# Altium PCB FMCOMMS3.PcbDoc (part 1 of 3)
Units mil, origin at the board's own origin, x right, y up, seen from the top; angles counter-clockwise.
Board outline 3368 x 2770 mil, 4 copper layers (Top Layer, Layer 1, Layer 2, Bottom Layer), stack 23.756 mil thick; 160 components, 137 nets, 746 pads, 735 vias.
Unrouted connection lines stored in the file: 16.
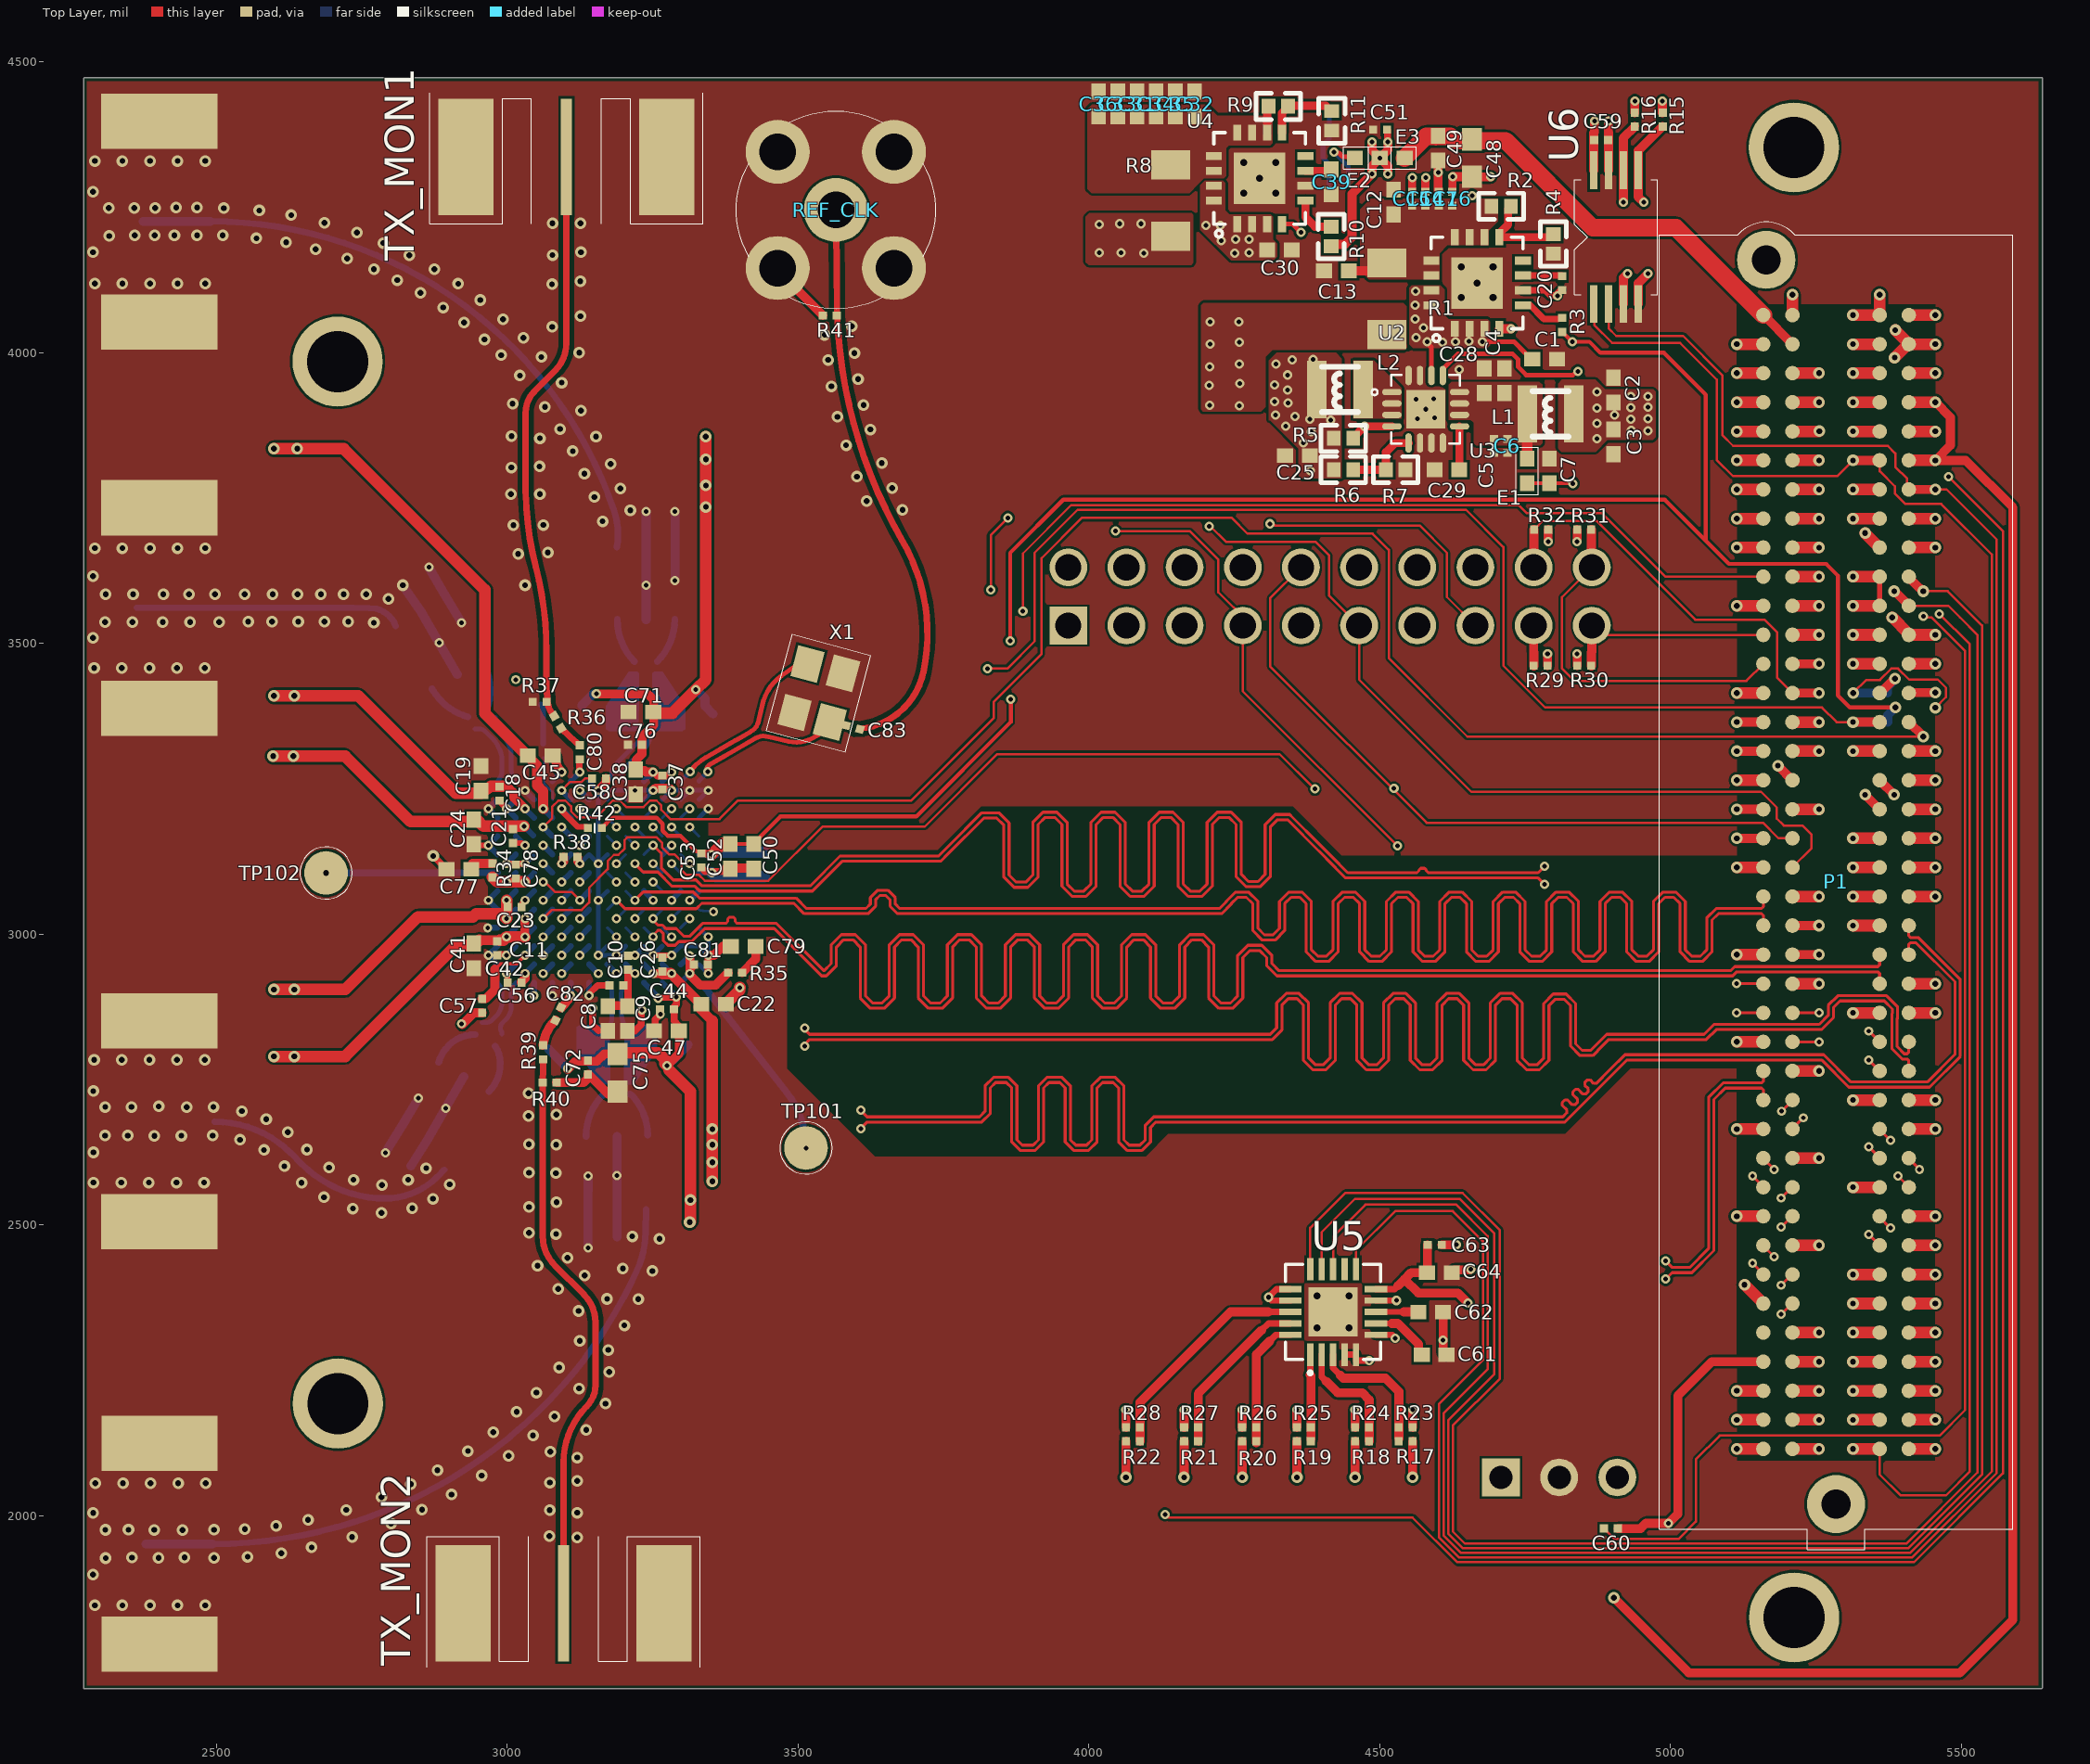
[diagram p0: Top Layer view]
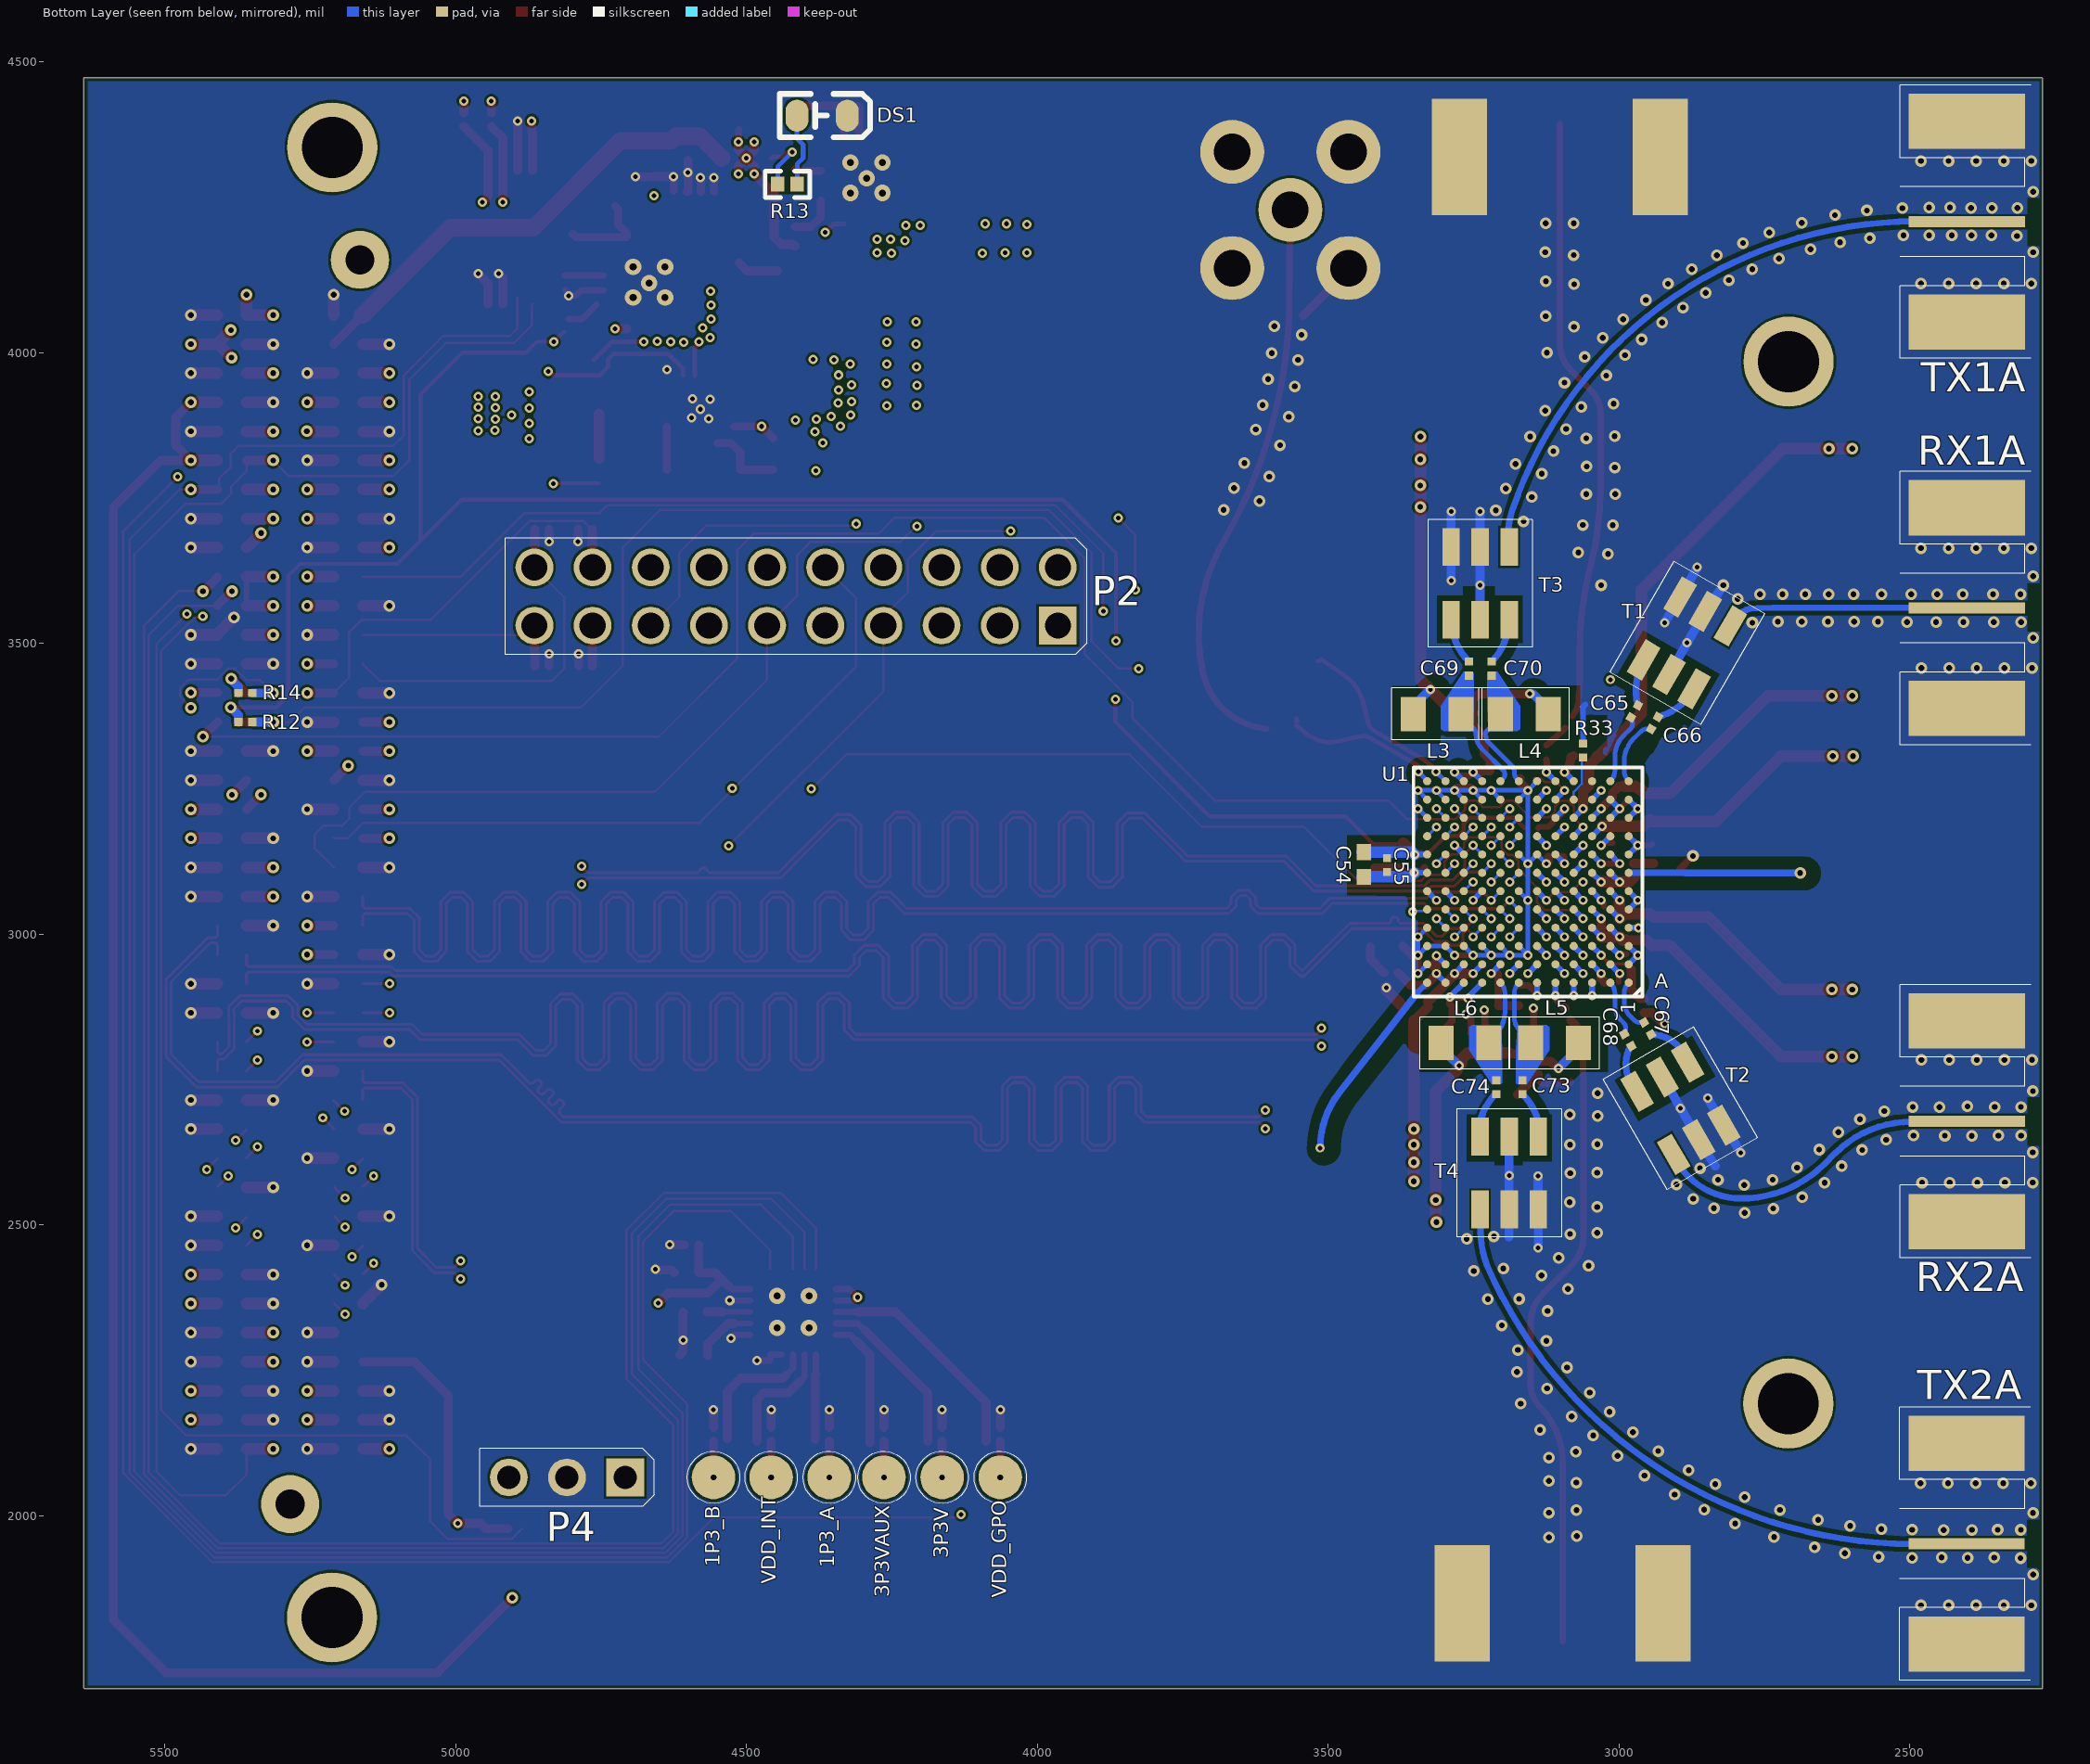
[diagram p1: Bottom Layer view, seen from below]
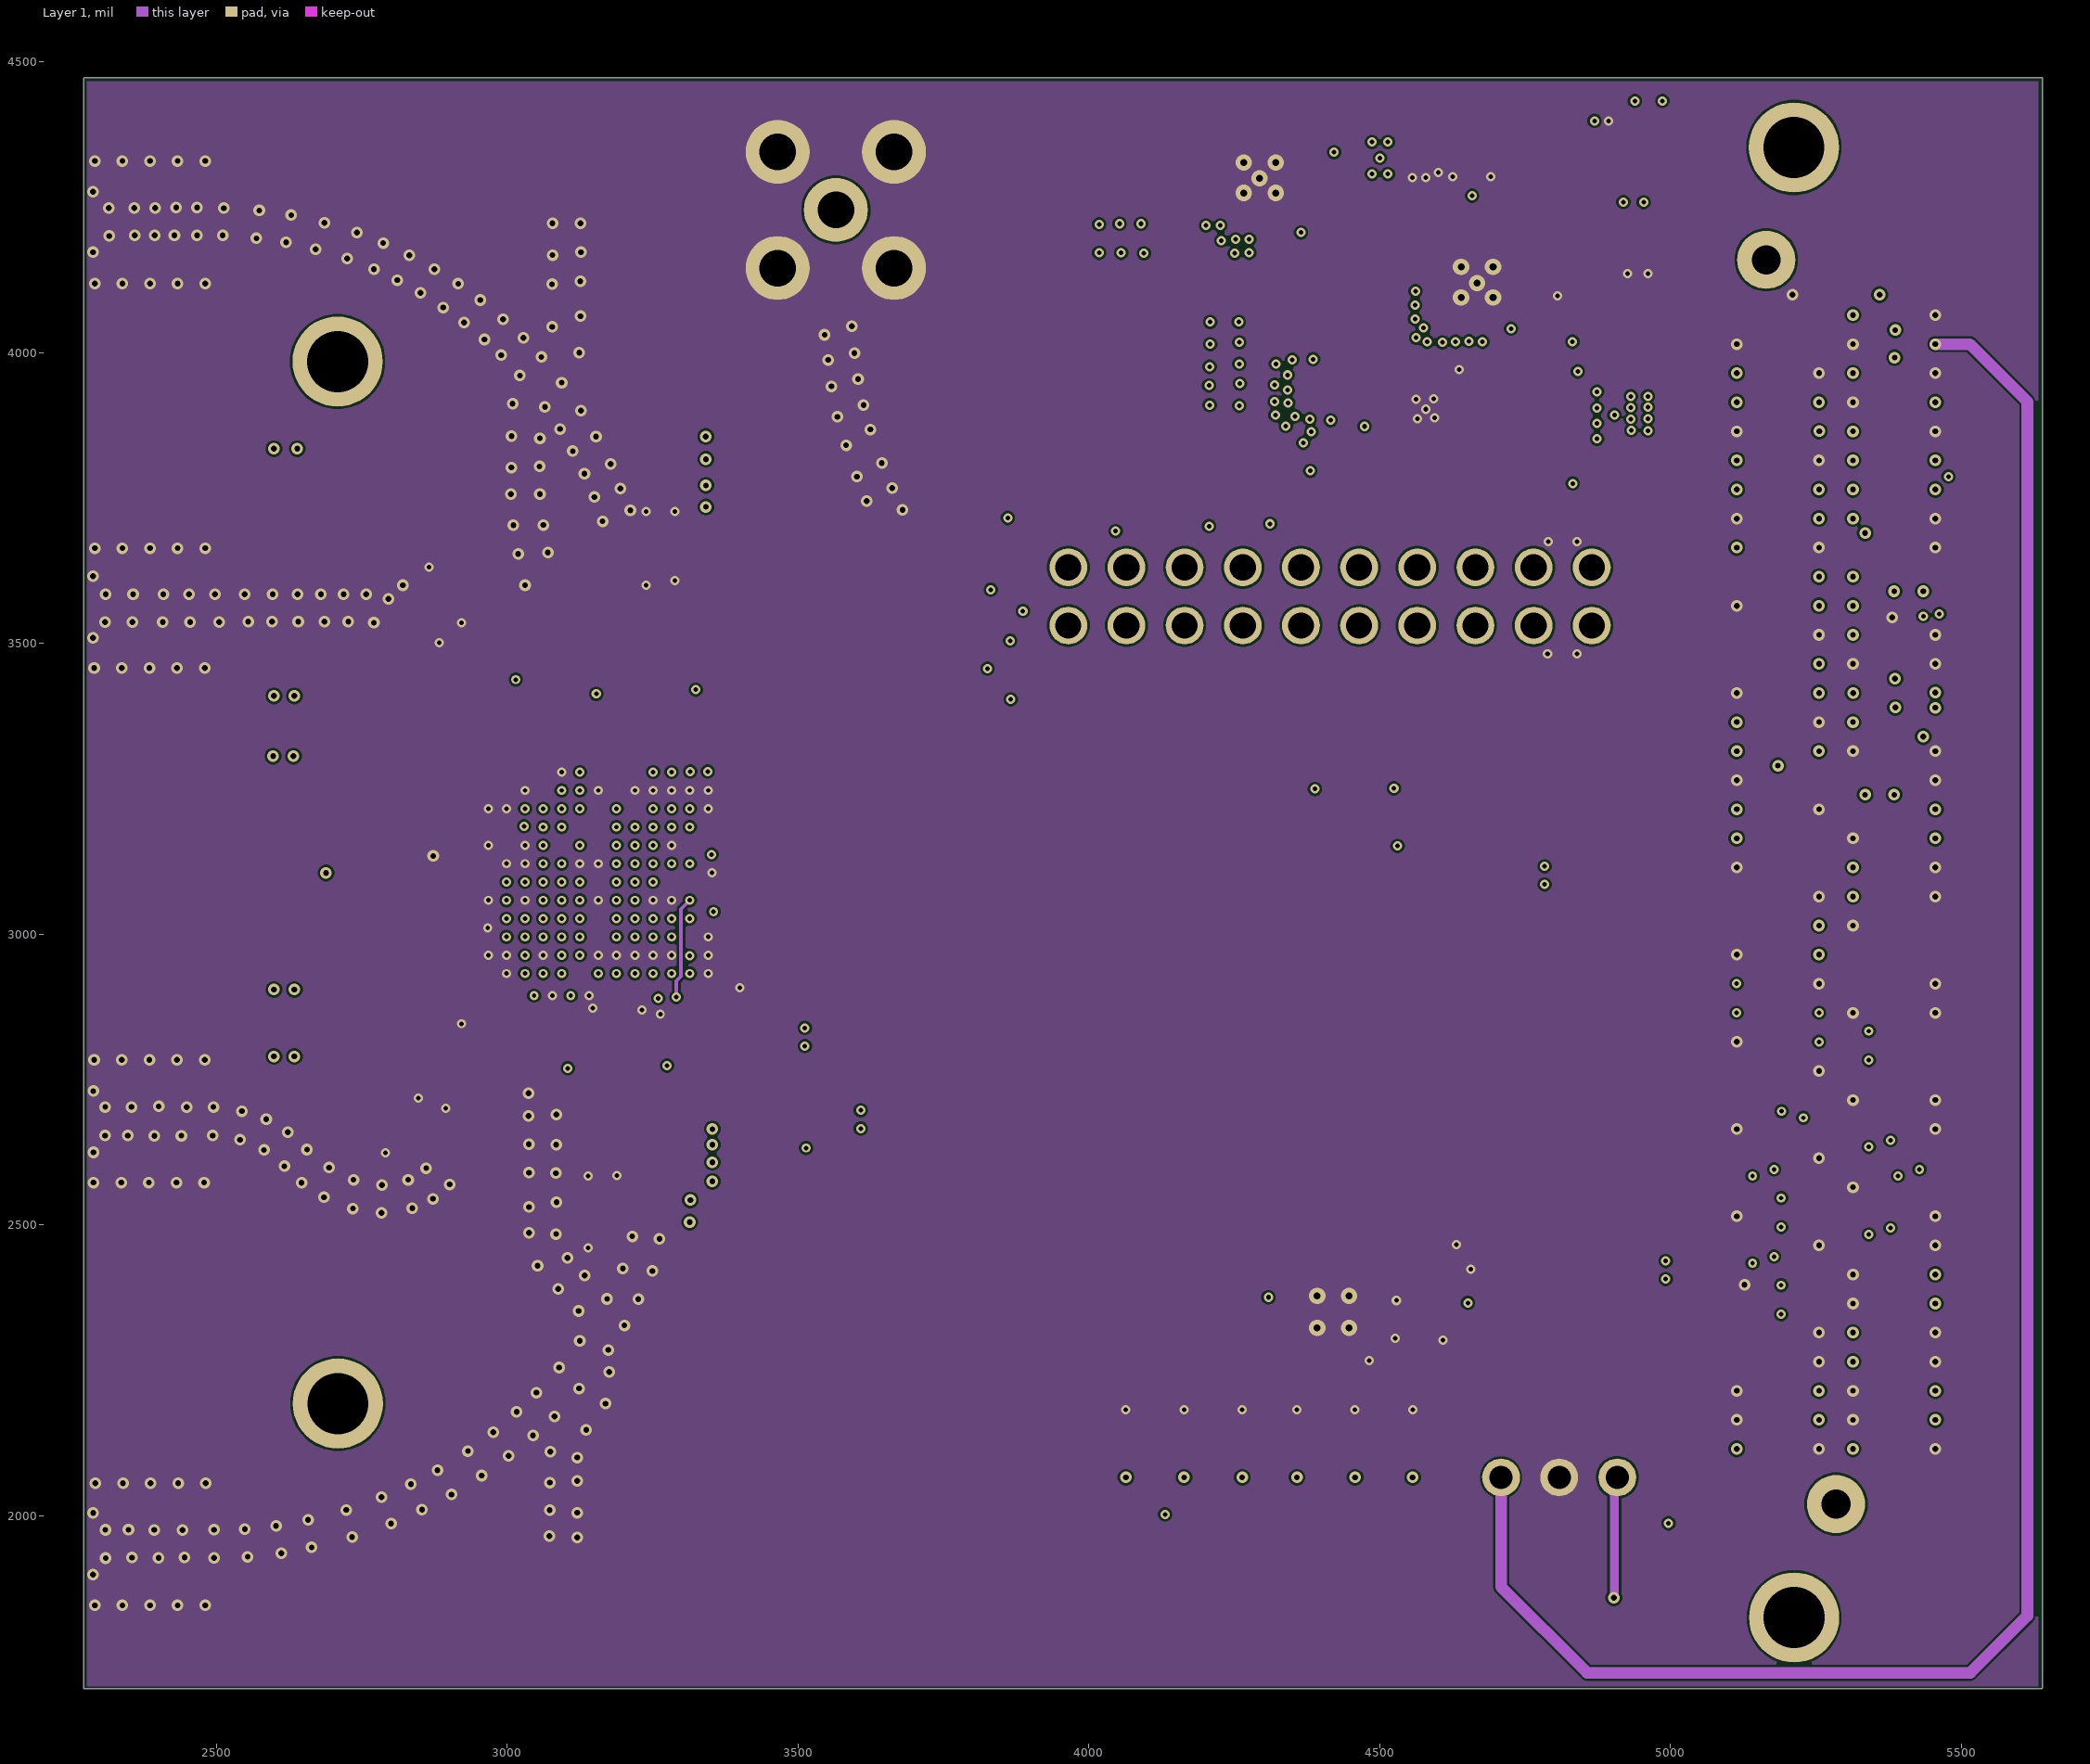
[diagram p2: Layer 1]
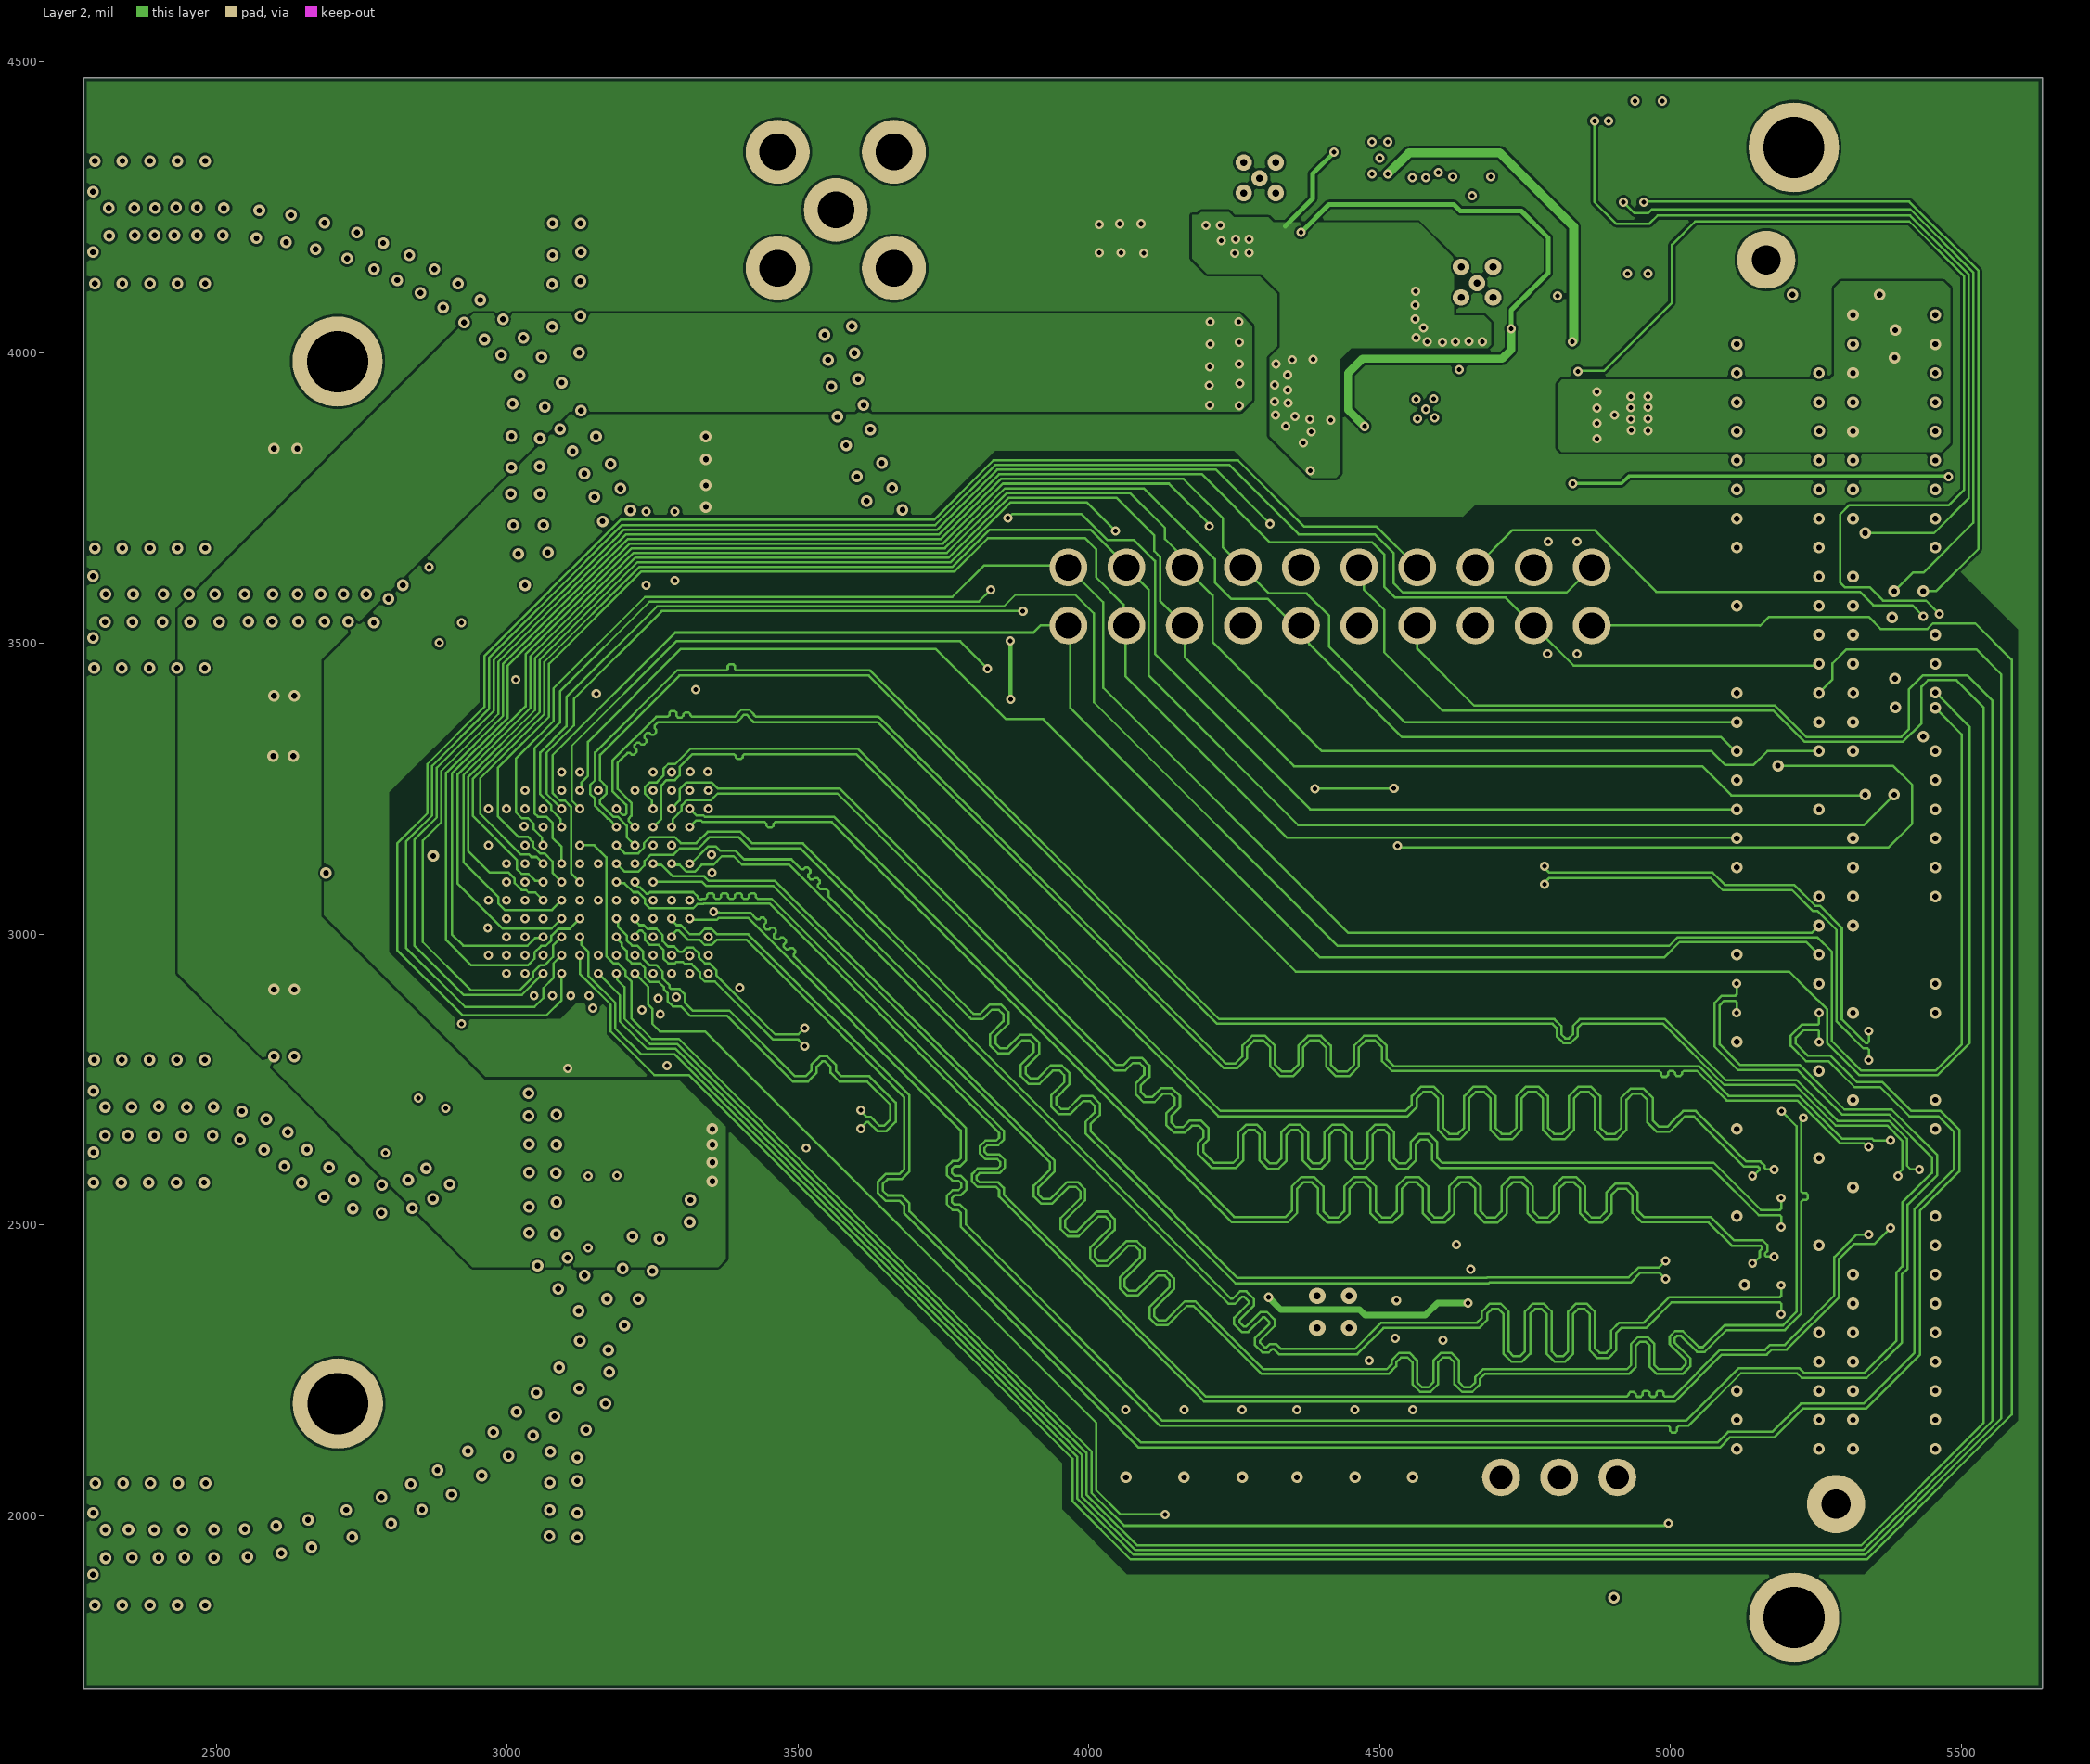
[diagram p3: Layer 2]

## Layer stack, top to bottom
Top Solder: solder mask 0.4, Solder Resist, Dk 3.5
Top Layer: signal copper 1.4
Dielectric 2: prepreg 2.8, PP-006, Dk 4.1
Layer 1: signal copper 1.378
Dielectric 1: dielectric 12.6, FR-4, Dk 4.8
Layer 2: signal copper 1.378
Dielectric 3: prepreg 2.8, PP-006, Dk 4.1
Bottom Layer: signal copper 1.4
Bottom Solder: solder mask 0.4, Solder Resist, Dk 3.5

## Board outline
2272,1703 5639,1703 5640,1704 5640,4473 2273,4473 2272,4472

## Design rules (kind name [scope] priority, off if disabled: settings)
Clearance [All] p1: gap=4 ignorepadtopadclearanceinfootprint=FALSE
ComponentClearance [All] p1: gap=1 collisioncheckmode=3 verticalgap=100000 showdistances=TRUE
DiffPairsRouting 差分对TXD [InDifferentialPairClass('TXD')] p1: maxlimit=10 minlimit=4 mostfreqgap=5 toplayer_prefgap=4 toplayer_minwidth=4 toplayer_maxwidth=15 toplayer_prefwidth=4.96 midlayer1_minwidth=4 midlayer1_maxwidth=15 midlayer1_prefwidth=4.02 midlayer2_minwidth=4 midlayer2_maxwidth=15 midlayer2_prefwidth=4.02 bottomlayer_prefgap=4 bottomlayer_minwidth=4 bottomlayer_maxwidth=15 bottomlayer_prefwidth=4.96 maxuncoupledlength=500
DiffPairsRouting 差分对RXD [InDifferentialPairClass('RXD')] p2: maxlimit=10 minlimit=4 mostfreqgap=5 toplayer_prefgap=4 toplayer_minwidth=4 toplayer_maxwidth=15 toplayer_prefwidth=4.96 midlayer1_minwidth=4 midlayer1_maxwidth=15 midlayer1_prefwidth=4.02 midlayer2_minwidth=4 midlayer2_maxwidth=15 midlayer2_prefwidth=4.02 bottomlayer_prefgap=4 bottomlayer_minwidth=4 bottomlayer_maxwidth=15 bottomlayer_prefwidth=4.96 maxuncoupledlength=500
HoleToHoleClearance [All] p1: gap=4 allowstackedmicrovias=TRUE
Length SPI [InNetClass('SPI')] p1: maxlimit=20 minlimit=0
Length C_OUT [InNetClass('C_OUT')] p2: maxlimit=20 minlimit=0
Length C_IN [InNetClass('C_IN')] p3: maxlimit=20 minlimit=0
MatchedLengths TX_DATA [InDifferentialPairClass('TXD')] p1: tolerance=1000 checknetsindiffpair=FALSE checkdiffpairvsdiffpair=TRUE checkxsignals=TRUE checkothers=TRUE
MatchedLengths RX_DATA [InDifferentialPairClass('RXD')] p2: tolerance=1000 checknetsindiffpair=FALSE checkdiffpairvsdiffpair=TRUE checkxsignals=TRUE checkothers=TRUE
MinimumSolderMaskSliver [All] p1: minsoldermaskwidth=4
PlaneConnect [All] p1: planeconnectstyle=Direct reliefexpansion=20 reliefentries=4 reliefconductorwidth=10 reliefairgap=10
PolygonConnect [All] p1: connectstyle=Direct reliefconductorwidth=10 reliefentries=4 polygonreliefangle="90 Angle" airgapwidth=10
RoutingVias [All] p1: holewidth=7.87 width=15.75 viastyle="Through Hole" minholewidth=7.87 minwidth=15.75 maxholewidth=28 maxwidth=50
SilkToSilkClearance [All] p1: silktosilkclearance=4
SilkToSolderMaskClearance [IsPad] p1: minsilkscreentomaskgap=4 clearancetoexposedcopper=TRUE
SolderMaskExpansion [All] p1: expansion=4 istentingtop=FALSE
Width [All] p1: maxlimit=50 minlimit=4 preferedwidth=4
23 further rules are at their usual default settings.

## Classes and differential pairs
net class TX: FB_CLK_N FB_CLK_P TX_D0_N TX_D0_P TX_D1_N TX_D1_P TX_D2_N TX_D2_P TX_D3_N TX_D3_P TX_D4_N TX_D4_P TX_D5_N TX_D5_P TX_FRAME_N TX_FRAME_P
net class RX: DATA_CLK_N DATA_CLK_P RX_D0_N RX_D0_P RX_D1_N RX_D1_P RX_D2_N RX_D2_P RX_D3_N RX_D3_P RX_D4_N RX_D4_P RX_D5_N RX_D5_P RX_FRAME_N RX_FRAME_P
differential pair class TXD: FB_CLK TX_D0 TX_D1 TX_D2 TX_D3 TX_D4 TX_D5 TX_FRAME
differential pair class RXD: DATA_CLK RX_D0 RX_D1 RX_D2 RX_D3 RX_D4 RX_D5 RX_FRAME
net class SPI: SPI_CLK SPI_DI SPI_DO SPI_ENB
net class C_OUT: CTRL_OUT0 CTRL_OUT1 CTRL_OUT2 CTRL_OUT3 CTRL_OUT4 CTRL_OUT5 CTRL_OUT6 CTRL_OUT7
net class C_IN: CTRL_IN0 CTRL_IN1 CTRL_IN2 CTRL_IN3
component class "03 AD9361_Digital": C65 C66 C67 C68 C69 C70 C71 C72 C73 C74 C75 C76 C77 C78 C79 C80 C81 C82 C83 L3 L4 L5 L6 R33 R34 R35 R36 R37 R38 R39 R40 R41 R42 REF_CLK RX1A RX2A T1 T2 T3 TP101 TP102 TX1A TX2A TX_MON1 TX_MON2 U1 X1
component class "02 LP_FMC": 1P3_A 1P3_B 3P3V 3P3VAUX C56 C57 C58 C59 C60 C61 C62 C63 C64 DS1 P1 P2 R12 R13 R14 R15 R16 R17 R18 R19 R20 R21 R22 R23 R24 R25 R26 R27 R28 R29 R30 R31 R32 U5 U6 VDD_GPO VDD_INT
component class "01 POWER": 3 C1 C2 C3 C4 C5 C6 C7 C8 C10 C11 C12 C13 C14 C15 C16 C17 C18 C19 C20 C21 C22 C23 C24 C25 C26 C28 C29 C30 C31 C32 C33 C34 C35 C36 C37 C38 C39 C41 C42 C44 C45 C47 C48 C49 C50 C51 C52 C53 C54 C55 E1 E2 E3 L1 L2 P4 R1 R2 R3 R4 R5 R6 R7 R8 R9 R10 R11 U2 U3 U4
differential pair TX_FRAME: +TX_FRAME_P -TX_FRAME_N
differential pair TX_D5: +TX_D5_P -TX_D5_N
differential pair TX_D4: +TX_D4_P -TX_D4_N
differential pair TX_D3: +TX_D3_P -TX_D3_N
differential pair TX_D2: +TX_D2_P -TX_D2_N
differential pair TX_D1: +TX_D1_P -TX_D1_N
differential pair TX_D0: +TX_D0_P -TX_D0_N
differential pair TX2A: +TX2A_P -TX2A_N
differential pair TX1A: +TX1A_P -TX1A_N
differential pair RX_FRAME: +RX_FRAME_P -RX_FRAME_N
differential pair RX_D5: +RX_D5_P -RX_D5_N
differential pair RX_D4: +RX_D4_P -RX_D4_N
differential pair RX_D3: +RX_D3_P -RX_D3_N
differential pair RX_D2: +RX_D2_P -RX_D2_N
differential pair RX_D1: +RX_D1_P -RX_D1_N
differential pair RX_D0: +RX_D0_P -RX_D0_N
differential pair RX2A: +RX2A_P -RX2A_N
differential pair RX1A: +RX1A_P -RX1A_N
differential pair FB_CLK: +FB_CLK_P -FB_CLK_N
differential pair DATA_CLK: +DATA_CLK_P -DATA_CLK_N

## Components (designator, comment, footprint, x,y, rotation, side; value= is the part's Value field where it differs from the comment)
1P3_A "TEST POINT SURFACE" TPC75D45 4358,2066 r90 bottom (schematic designator TP241)
1P3_B "TEST POINT SURFACE" TPC75D45 4557,2066 r90 bottom (schematic designator TP244)
3P3V "TEST POINT SURFACE" TPC75D45 4164,2066 r90 bottom (schematic designator TP239)
3P3VAUX "TEST POINT SURFACE" TPC75D45 4264,2066 r90 bottom (schematic designator TP238)
C1 "0.1UF" C0402 4784,3989 r180 top
C2 "10UF" C0402 4902,3936 r90 top
C3 "0.1UF" C0402 4902,3847 r270 top
C4 "10UF" C0402 4715,3952 r90 top
C5 "0.1UF" C0201 4697,3840 r270 top
C6 "0.1UF" C0201 4720,3840 r270 top
C7 "0.1UF" C0402 4792,3797 r90 top
C8 "1UF" C0402 3173,2855 r270 top
C9 "1UF" C0402 3207,2855 r270 top
C10 "0.01UF" C0201 3208,2951 r90 top
C11 "0.01UF" C0201 3188,2912 r180 top
C12 "10UF" C0402 4524,4259.25 r90 top
C13 "10UF" C0402 4426,4141 r180 top
C14 "0.1UF" C0201 4579,4265 r90 top
C15 "0.1UF" C0201 4556,4265 r90 top
C16 "0.1UF" C0201 4625,4265 r90 top
C17 "0.1UF" C0201 4602,4265 r90 top
C18 "0.01UF" C0201 2987,3242 r270 top
C19 "1UF" C0402 2955,3268 r90 top
C20 "0.01UF" C0201 4814,4120 r270 top
C21 "0.01UF" C0201 3010,3169 r270 top
C22 "1UF" C0402 3355,2880 r0 top
C23 "0.01UF" C0201 3013,3047 r0 top
C24 "1UF" C0402 2943,3176 r270 top
C25 "10UF" C0402 4359,3823 r0 top
C26 "0.01UF" C0201 3267,2948 r90 top
C28 "10UF" C0402 4680,3952 r270 top
C29 "0.1μF" C0402 4616,3799 r0 top
C30 "0.1UF" C0402 4328,4177 r180 top
C31 "10UF" C0402 4083,4428 r90 top
C32 "10UF" C0402 4182,4428 r90 top
C33 "0.1UF" C0402 4050,4428 r90 top
C34 "0.1UF" C0402 4116,4428 r90 top
C35 "0.1UF" C0402 4149,4428 r90 top
C36 "0.1UF" C0402 4017,4428 r90 top
C37 "0.01UF" C0201 3267,3261 r270 top
C38 "1UF" C0402 3221,3262 r270 top
C39 "0.01UF" C0402 4417,4294 r270 top
C41 "1UF" C0402 2943,2963 r270 top
C42 "0.01UF" C0201 2983,2976 r270 top
C44 "0.01UF" C0201 3275,2871 r180 top
C45 "1UF" C0402 3057,3307 r0 top
C47 "1UF" C0402 3274,2834 r180 top
C48 "10UF" C0603 4659,4335 r270 top
C49 "0.1UF" C0402 4601,4352 r270 top
C50 "10UF" C0402 3424,3134 r270 top
C51 "0.1UF" C0201 4501,4384 r180 top
C52 "1UF" C0402 3384,3134 r270 top
C53 "0.01UF" C0201 3334,3127 r270 top
C54 "1UF" C0402 3439,3120 r270 bottom
C55 "0.01UF" C0201 3399,3119 r270 bottom
C56 "0.1UF" C0201 3013,2917 r180 top
C57 "0.1UF" C0201 2957,2877 r270 top
C58 "0.1UF" C0201 3158,3268 r0 top
C59 "0.1UF" C0201 4881,4366 r180 top
C60 "0.1UF" C0201 4898,1978 r0 top
C61 "10UF" C0402 4594,2277 r180 top
C62 "1UF" C0402 4588,2350 r0 top
C63 "0.1UF" C0201 4595,2466 r0 top
C64 "10UF" C0402 4603,2418 r0 top
C65 "18PF" C0201 2973.64,3383.39 r120 bottom
C66 "18PF" C0201 2939,3363.39 r120 bottom
C67 "18PF" C0201 2951,2838 r240 bottom
C68 "18PF" C0201 2985,2818 r240 bottom
C69 "18PF" C0201 3258,3457 r90 bottom
C70 "18PF" C0201 3219,3457 r90 bottom
C71 "10UF" C0402 3230,3382 r0 top
C72 "1000PF" C0201 3139,2771 r90 top
C73 "18PF" C0201 3166,2737 r270 bottom
C74 "18PF" C0201 3211,2737 r270 bottom
C75 "10UF" C0603 3190,2762 r90 top
C76 "1000PF" C0201 3220,3326 r0 top
C77 "1UF" C0402 2917,3112 r0 top
C78 "1000PF" C0201 3015,3108 r90 top
C79 "1UF" C0402 3406,2979 r0 top
C80 "1000PF" C0201 3125,3313 r270 top
C81 "1000PF" C0201 3333,2948 r0 top
C82 "1000PF" C0201 3088,2863 r65 top
C83 "0.1UF" C0201 3595,3356 r345 top
DS1 "16-213SURC/S530-A3/TR8" LED0805-RD 4370.31,4408 r0 bottom
E1 "750OHM" L0402 4754,3797 r90 top
E2 "750OHM" L0402 4479,4335 r180 top
E3 "750OHM" L0402 4522,4335 r0 top
L1 "0.47UH" L1008 4794.08,3895 r180 top
L2 "2.2UH" L1008 4432,3937 r180 top
L3 "330NH" L0805-F 3313,3379 r0 bottom
L4 "330NH" L0805-F 3163,3379 r180 bottom
L5 "330NH" L0805-F 3111.19,2813 r180 bottom locked
L6 "330NH" L0805-F 3265,2813 r0 bottom locked
P1 "ASP-134604-01" CNSAMTECASP-134604-01 5285,3083.5 r90 top locked
P2 "Header 10X2" CNBERGF2X10H335LD32 4415,3581 r0 bottom locked
P4 "Header 3" CNBERG1X3H205LD36 4809,2066 r0 bottom
R1 "0" R1206 4513,4093 r270 top
R2 "16K" LC-0402_R 4709.27,4252 r180 top
R3 "10K" C0201 4814,4048 r90 top
R4 "10K" LC-0402_R 4799,4187.27 r90 top
R5 "10K" LC-0402_R 4438,3853 r0 top
R6 "18.7K" LC-0402_R 4438,3799 r0 top
R7 "15K" LC-0402_R 4528,3799 r0 top
R8 "0" R1206 4141,4262 r270 top
R9 "16K" LC-0402_R 4326,4424 r180 top
R10 "10K" LC-0402_R 4417,4200 r90 top
R11 "10K" LC-0402_R 4418,4399 r90 top
R12 "10K" C0201 5362,3365 r0 bottom
R13 "237" LC-0402_R 4430,4290 r0 bottom
R14 "49.9" C0201 5362,3415 r180 bottom
R15 "2K" C0201 4987,4401 r90 top
R16 "2K" C0201 4939,4401 r90 top
R17 "10K" C0201 4545,2128 r180 top
R18 "10K" C0201 4470,2128 r0 top
R19 "10K" C0201 4370,2128 r0 top
R20 "10K" C0201 4276,2128 r0 top
R21 "10K" C0201 4176,2128 r0 top
R22 "10K" C0201 4076,2128 r0 top
R23 "16K" C0201 4545,2152 r0 top
R24 "16K" C0201 4470,2152 r180 top
R25 "16K" C0201 4370,2152 r180 top
R26 "16K" C0201 4276,2152 r180 top
R27 "16K" C0201 4176,2152 r180 top
R28 "16K" C0201 4076,2152 r180 top
R29 "10K" C0201 4777,3462 r180 top
R30 "10K" C0201 4852,3462 r0 top
R31 "10K" C0201 4852,3696 r0 top
R32 "10K" C0201 4778,3696 r180 top
R33 "14.3K" C0201 3062,3316 r270 bottom
R34 "1" C0201 2975,3110 r90 top
R35 "1" C0201 3392,2934 r0 top
R36 "10" C0201 3087,3365 r300 top
R37 "49.9" C0201 3056.13,3399.74 r0 top
R38 "10K" C0201 3109,3133 r180 top
R39 "10" C0201 3062,2797 r90 top
R40 "49.9" C0201 3073,2745 r180 top
R41 "49.9" C0201 3555,4064 r0 top
R42 "10K" R0201 3151,3183 r180 top
REF_CLK "DOSIN-806-0010" CNJOHNSON142-0701-201 3565.25,4245.75 r90 top
RX1A "DOSIN-806-0010" CNSMARAL687W375H171 2404.5,3561 r180 bottom locked
RX2A "DOSIN-806-0010" CNSMARAL687W375H171 2404.5,2678.5 r180 bottom locked
T1 "TCM1-63AX+" TSML150W160H160 2883.07,3501.08 r210 bottom
T2 "TCM1-63AX+" TSML150W160H160 2894.36,2700.71 r330 bottom
T3 "TCM1-63AX+" TSML150W160H160 3239,3603.5 r180 bottom
T4 "TCM1-63AX+" TSML150W160H160 3189,2589.5 r0 bottom
TP101 "TEST POINT SURFACE" TPC75D45 3513.97,2632.5 r90 top
TP102 "TEST POINT SURFACE" TPC75D45 2688.72,3105.51 r90 top
TX1A "DOSIN-806-0010" CNSMARAL687W375H171 2404.5,4225.5 r180 bottom locked
TX2A "DOSIN-806-0010" CNSMARAL687W375H171 2405,1952 r180 bottom locked
TX_MON1 "DOSIN-806-0010" CNSMARAL687W375H171 3102,4334.5 r90 top locked (schematic designator RF1)
TX_MON2 "DOSIN-806-0010" CNSMARAL687W375H171 3097,1852 r270 top locked (schematic designator RF2)
U1 "AD9363" AD936X 3120.51,3081.28 r0 bottom locked
U2 "ADP1755ACPZ-R7" LFCSP-WQ-16_L4.0-W4.0-P0.65-EP2.3-BL-EP 4667.79,4120.26 r0 top
U3 "TLV62130" TLV62130RGT 4580,3903 r270 top
U4 "ADP1755ACPZ-R7" LFCSP-WQ-16_L4.0-W4.0-P0.65-EP2.3-BL-EP 4294,4300 r0 top
U5 "AD7291BCPZ-RL7" LFCSP-20_L4.0-W4.0-P0.50-TL-EP2.7 4420.31,2350.52 r90 top locked
U6 "M24C02-WDW6TP" TSSOP8 4906.61,4198.96 r0 top
VDD_GPO "TEST POINT SURFACE" TPC75D45 4064,2066 r90 bottom (schematic designator TP240)
VDD_INT "TEST POINT SURFACE" TPC75D45 4458,2066 r90 bottom (schematic designator TP243)
X1 "40MHz" XTALNX3225 3535.78,3415 r75 top

## Footprints (in the part's own frame and the unit in brackets; to place one, negate y for a bottom-side part, rotate by r counter-clockwise, add the part's x,y. Pads: shape width x height; smd on the part's side, far side on the other; paste and mask are expansions set on the pad)
AD936X [mil]
  round 14 smd: A1(-137.01,164.51) A2(-105.51,164.51) A3(-74.02,164.51) A4(-42.52,164.51) A5(-11.02,164.51) A6(20.47,164.51) A7(51.97,164.51) A8(83.46,164.51) A9(114.96,164.51) A10(146.46,164.51) A11(177.95,164.51) A12(209.45,164.51) B1(-137.01,133.01) B2(-105.51,133.01) B3(-74.02,133.01) B4(-42.52,133.01) B5(-11.02,133.01) B6(20.47,133.01) B7(51.97,133.01) B8(83.46,133.01) B9(114.96,133.01) B10(146.46,133.01) B11(177.95,133.01) B12(209.45,133.01) C1(-137.01,101.52) C2(-105.51,101.52) C3(-74.02,101.52) C4(-42.52,101.52) C5(-11.02,101.52) C6(20.47,101.52) C7(51.97,101.52) C8(83.46,101.52) C9(114.96,101.52) C10(146.46,101.52) C11(177.95,101.52) C12(209.45,101.52) D1(-137.01,70.02) D2(-105.51,70.02) D3(-74.02,70.02) D4(-42.52,70.02) D5(-11.02,70.02) D6(20.47,70.02) D7(51.97,70.02) D8(83.46,70.02) D9(114.96,70.02) D10(146.46,70.02) D11(177.95,70.02) D12(209.45,70.02) E1(-137.01,38.52) E2(-105.51,38.52) E3(-74.02,38.52) E4(-42.52,38.52) E5(-11.02,38.52) E6(20.47,38.52) E7(51.97,38.52) E8(83.46,38.52) E9(114.96,38.52) E10(146.46,38.52) E11(177.95,38.52) E12(209.45,38.52) F1(-137.01,7.03) F2(-105.51,7.03) F3(-74.02,7.03) F4(-42.52,7.03) F5(-11.02,7.03) F6(20.47,7.03) F7(51.97,7.03) F8(83.46,7.03) F9(114.96,7.03) F10(146.46,7.03) F11(177.95,7.03) F12(209.45,7.03) G1(-137.01,-24.47) G2(-105.51,-24.47) G3(-74.02,-24.47) G4(-42.52,-24.47) G5(-11.02,-24.47) G6(20.47,-24.47) G7(51.97,-24.47) G8(83.46,-24.47) G9(114.96,-24.47) G10(146.46,-24.47) G11(177.95,-24.47) G12(209.45,-24.47) H1(-137.01,-55.96) H2(-105.51,-55.96) H3(-74.02,-55.96) H4(-42.52,-55.96) H5(-11.02,-55.96) H6(20.47,-55.96) H7(51.97,-55.96) H8(83.46,-55.96) H9(114.96,-55.96) H10(146.46,-55.96) H11(177.95,-55.96) H12(209.45,-55.96) J1(-137.01,-87.46) J2(-105.51,-87.46) J3(-74.02,-87.46) J4(-42.52,-87.46) J5(-11.02,-87.46) J6(20.47,-87.46) J7(51.97,-87.46) J8(83.46,-87.46) J9(114.96,-87.46) J10(146.46,-87.46) J11(177.95,-87.46) J12(209.45,-87.46) K1(-137.01,-118.96) K2(-105.51,-118.96) K3(-74.02,-118.96) K4(-42.52,-118.96) K5(-11.02,-118.96) K6(20.47,-118.96) K7(51.97,-118.96) K8(83.46,-118.96) K9(114.96,-118.96) K10(146.46,-118.96) K11(177.95,-118.96) K12(209.45,-118.96) L1(-137.01,-150.45) L2(-105.51,-150.45) L3(-74.02,-150.45) L4(-42.52,-150.45) L5(-11.02,-150.45) L6(20.47,-150.45) L7(51.97,-150.45) L8(83.46,-150.45) L9(114.96,-150.45) L10(146.46,-150.45) L11(177.95,-150.45) L12(209.45,-150.45) M1(-137.01,-181.95) M2(-105.51,-181.95) M3(-74.02,-181.95) M4(-42.52,-181.95) M5(-11.02,-181.95) M6(20.47,-181.95) M7(51.97,-181.95) M8(83.46,-181.95) M9(114.96,-181.95) M10(146.46,-181.95) M11(177.95,-181.95) M12(209.45,-181.95)
  silkscreen extent -161,-206 233,188
C0201 [mil] "C0201"
  rect 14x14 smd: 1(-12,0) 2(12,0)
C0402 [mil] "C0402"
  rect 27.5x25 smd: 1(-21.25,0) 2(21.25,0)
C0603 [mil] "C0603"
  rect 38.5x35 smd: 1(-32.25,0) 2(32.25,0)
CNBERG1X3H205LD36 [mil] "CNBERG1X3H205LD36"
  rect 65x65 / inner round 65 / far side rect 65x65 hole 40: 1(-100,0)
  round 65 hole 40: 2(0,0) 3(100,0)
  silkscreen extent -150,-50 150,50
CNBERGF2X10H335LD32 [mil] "CNBERGF2X10H335LD32"
  rect 65x65 / inner round 65 / far side rect 65x65 hole 45: 1(-450,50)
  round 65 hole 45: 2(-450,-50) 3(-350,50) 4(-350,-50) 5(-250,50) 6(-250,-50) 7(-150,50) 8(-150,-50) 9(-50,50) 10(-50,-50) 11(50,50) 12(50,-50) 13(150,50) 14(150,-50) 15(250,50) 16(250,-50) 17(350,50) 18(350,-50) 19(450,50) 20(450,-50)
  silkscreen extent -500,-100 500,100
CNJOHNSON142-0701-201 [mil] "CNJOHNSON142-0701-201"
  round 110 hole 63: 1(100,100) 2(100,-100) 3(-100,-100) 4(-100,100) 5(0,0)
  silkscreen extent -169,-172 169,172
CNSAMTECASP-134604-01 [mil] "CNSAMTECASP-134604-01"
  round 25 smd: C1(-968.5,-125) C2(-918.5,-125) C3(-868.5,-125) C4(-818.5,-125) C5(-768.5,-125) C6(-718.5,-125) C7(-668.5,-125) C8(-618.5,-125) C9(-568.5,-125) C10(-518.5,-125) C11(-468.5,-125) C12(-418.5,-125) C13(-368.5,-125) C14(-318.5,-125) C15(-268.5,-125) C16(-218.5,-125) C17(-168.5,-125) C18(-118.5,-125) C19(-68.5,-125) C20(-18.5,-125) C21(31.5,-125) C22(81.5,-125) C23(131.5,-125) C24(181.5,-125) C25(231.5,-125) C26(281.5,-125) C27(331.5,-125) C28(381.5,-125) C29(431.5,-125) C30(481.5,-125) C31(531.5,-125) C32(581.5,-125) C33(631.5,-125) C34(681.5,-125) C35(731.5,-125) C36(781.5,-125) C37(831.5,-125) C38(881.5,-125) C39(931.5,-125) C40(981.5,-125) D1(-968.5,-75) D2(-918.5,-75) D3(-868.5,-75) D4(-818.5,-75) D5(-768.5,-75) D6(-718.5,-75) D7(-668.5,-75) D8(-618.5,-75) D9(-568.5,-75) D10(-518.5,-75) D11(-468.5,-75) D12(-418.5,-75) D13(-368.5,-75) D14(-318.5,-75) D15(-268.5,-75) D16(-218.5,-75) D17(-168.5,-75) D18(-118.5,-75) D19(-68.5,-75) D20(-18.5,-75) D21(31.5,-75) D22(81.5,-75) D23(131.5,-75) D24(181.5,-75) D25(231.5,-75) D26(281.5,-75) D27(331.5,-75) D28(381.5,-75) D29(431.5,-75) D30(481.5,-75) D31(531.5,-75) D32(581.5,-75) D33(631.5,-75) D34(681.5,-75) D35(731.5,-75) D36(781.5,-75) D37(831.5,-75) D38(881.5,-75) D39(931.5,-75) D40(981.5,-75) G1(-968.5,75) G2(-918.5,75) G3(-868.5,75) G4(-818.5,75) G5(-768.5,75) G6(-718.5,75) G7(-668.5,75) G8(-618.5,75) G9(-568.5,75) G10(-518.5,75) G11(-468.5,75) G12(-418.5,75) G13(-368.5,75) G14(-318.5,75) G15(-268.5,75) G16(-218.5,75) G17(-168.5,75) G18(-118.5,75) G19(-68.5,75) G20(-18.5,75) G21(31.5,75) G22(81.5,75) G23(131.5,75) G24(181.5,75) G25(231.5,75) G26(281.5,75) G27(331.5,75) G28(381.5,75) G29(431.5,75) G30(481.5,75) G31(531.5,75) G32(581.5,75) G33(631.5,75) G34(681.5,75) G35(731.5,75) G36(781.5,75) G37(831.5,75) G38(881.5,75) G39(931.5,75) G40(981.5,75) H1(-968.5,125) H2(-918.5,125) H3(-868.5,125) H4(-818.5,125) H5(-768.5,125) H6(-718.5,125) H7(-668.5,125) H8(-618.5,125) H9(-568.5,125) H10(-518.5,125) H11(-468.5,125) H12(-418.5,125) H13(-368.5,125) H14(-318.5,125) H15(-268.5,125) H16(-218.5,125) H17(-168.5,125) H18(-118.5,125) H19(-68.5,125) H20(-18.5,125) H21(31.5,125) H22(81.5,125) H23(131.5,125) H24(181.5,125) H25(231.5,125) H26(281.5,125) H27(331.5,125) H28(381.5,125) H29(431.5,125) H30(481.5,125) H31(531.5,125) H32(581.5,125) H33(631.5,125) H34(681.5,125) H35(731.5,125) H36(781.5,125) H37(831.5,125) H38(881.5,125) H39(931.5,125) H40(981.5,125)
  round 100 hole 50 unplated: ""(-1063.5,0) ""(1076.5,120)
  silkscreen extent -1142,-304 1141,304
CNSMARAL687W375H171 [mil]
  rect 200x95 smd far side: 1(2.5,-172.5) 3(2.5,172.5)
  rect 200x95 smd: 2(2.5,172.5) 4(2.5,-172.5)
  rect 200x19 smd: 5(2.5,0)
  silkscreen extent -113,-235 113,235
L0402 [mil] "L0402"
  rect 27.5x25 smd: 1(-21.25,0) 2(21.25,0)
  silkscreen extent -41,-19 41,19
L0805-F [mil] "L0805-F"
  rect 43x59 smd: 1(41.19,0) 2(-41.19,0)
  silkscreen extent -78,-44 78,44
L1008 [mil]
  rect 33.5x98.4 smd: 1(-39.92,0) 2(40.08,0)
  silkscreen extent -31,-39 31,39
LC-0402_R [mm]
  rect 0.6x0.65 smd mask+0.051: 1(-0.425,0) 2(0.425,0)
  silkscreen extent -0.97,-0.58 0.97,0.58, body extent -0.57,-0.27 0.58,0.28, height 0.41
LED0805-RD [mm]
  oval 1x1.4 smd: 1(-1.1,0) 2(1.1,0)
  silkscreen extent -2.1,-0.95 1.85,0.95
LFCSP-20_L4.0-W4.0-P0.50-TL-EP2.7 [mm]
  rect 0.985x0.28 smd: 1(-1.868,1) 2(-1.868,0.5) 3(-1.868,0) 4(-1.868,-0.5) 5(-1.868,-1) 11(1.868,-1) 12(1.868,-0.5) 13(1.868,0) 14(1.868,0.5) 15(1.868,1)
  rect 0.28x0.985 smd: 6(-1,-1.868) 7(-0.5,-1.868) 8(0,-1.868) 9(0.5,-1.868) 10(1,-1.868) 16(1,1.868) 17(0.5,1.868) 18(0,1.868) 19(-0.5,1.868) 20(-1,1.868)
  rect 2.15x2.15 smd: 21(0,0)
  silkscreen extent -2.73,-2.08 2.08,2.08
LFCSP-WQ-16_L4.0-W4.0-P0.65-EP2.3-BL-EP [mm]
  rect 0.35x0.7 smd: 1(-0.975,-2) 2(-0.325,-2) 3(0.325,-2) 4(0.975,-2) 9(0.975,2) 10(0.325,2) 11(-0.325,2) 12(-0.975,2)
  rect 0.7x0.35 smd: 5(2,-0.975) 6(2,-0.325) 7(2,0.325) 8(2,0.975) 13(-2,0.975) 14(-2,0.325) 15(-2,-0.325) 16(-2,-0.975)
  rect 2.25x2.25 smd: 17(0,0)
  silkscreen extent -2,-2.56 2,2
R0201 [mil] "R0201"
  rect 14x14 smd: 1(-12,0) 2(12,0)
  silkscreen extent -1,-8 1,8
R1206 [mil] "R1206"
  rect 50x67 smd: 1(-61.5,0) 2(61.5,0)
  silkscreen extent -7,-38 7,38
TLV62130RGT [mil]
  oval 11x33.5 smd: 1(-29.5,-58.6) 2(-9.8,-58.6) 3(9.8,-58.6) 4(29.5,-58.6) 9(29.5,57.6) 10(9.8,57.6) 11(-9.8,57.6) 12(-29.5,57.6)
  oval 33.5x11 smd: 5(58.1,-30) 6(58.1,-10.3) 7(58.1,9.3) 8(58.1,29) 13(-58.1,29) 14(-58.1,9.3) 15(-58.1,-10.3) 16(-58.1,-30)
  rect 66.9x66.9 smd: 20(0,-0.5)
  silkscreen extent -59,-93 59,59
TPC75D45 [mil] "TPC75D45"
  round 75 smd: 1(0,0)
  silkscreen extent -45,-45 45,45
TSML150W160H160 [mil] "TSML150W160H160"
  rect 30x65.01 smd: 1(-50,62.5) 2(0,62.5) 3(50,62.5) 4(50,-62.5) 5(0,-62.5) 6(-50,-62.5)
  silkscreen extent -90,-110 90,110
TSSOP8 [mil] "TSSOP8"
  rect 13x65 smd: 1(-38.39,-114.96) 2(-12.8,-114.96) 3(12.8,-114.96) 4(38.39,-114.96) 5(38.39,114.96) 6(12.8,114.96) 7(-12.8,114.96) 8(-38.39,114.96)
  silkscreen extent -71,-99 71,99
XTALNX3225 [mil] "XTALNX3225"
  rect 55.01x47 smd: 1(-43.32,-31.51) 2(43.3,-31.51) 3(43.3,31.5) 4(-43.32,31.5)
  silkscreen extent -86,-70 86,70

## Part data
1P3_A 1P3_B 3P3V 3P3VAUX TP101 TP102 VDD_GPO VDD_INT: library part "TEST POINT SURFACE_1"
C1 C2 C3 C4 C5 C6 C7 C12 C13 C14 C15 C16 C17 C20 C30 C31 C32 C33 C34 C35 C36 C39 C48 C49 C50 C51 C56 C57 C58 C59 C60 C61 C63 C64 C65 C66 C67 C68 C69 C70 C71 C73 C74 C75 C83: BOM_Manufacturer=WTC, BOM_Manufacturer Part=0402B104K160, BOM_Supplier=LCSC, BOM_Supplier Part=C83056, nameAlias=Capacitance, spicePre=C, spiceSymbolName=0402B104K160
C8 C9 C10 C11 C18 C19 C21 C22 C23 C24 C26 C37 C38 C41 C42 C44 C45 C47 C52 C53 C54 C55: library part 10UF, BOM_Manufacturer=WTC, BOM_Manufacturer Part=0402B104K160, BOM_Supplier=LCSC, BOM_Supplier Part=C83056, nameAlias=Capacitance, spicePre=C, spiceSymbolName=0402B104K160
C25 C28 C29: library part CAP_3, "Capacitor"
C62 C77 C79: library part 0.1UF, BOM_Manufacturer=WTC, BOM_Manufacturer Part=0402B104K160, BOM_Supplier=LCSC, BOM_Supplier Part=C83056, nameAlias=Capacitance, spicePre=C, spiceSymbolName=0402B104K160
C72 C76 C80 C82: library part 18PF, BOM_Manufacturer=WTC, BOM_Manufacturer Part=0402B104K160, BOM_Supplier=LCSC, BOM_Supplier Part=C83056, nameAlias=Capacitance, spicePre=C, spiceSymbolName=0402B104K160
C78 C81: library part 100PF, BOM_Manufacturer=WTC, BOM_Manufacturer Part=0402B104K160, BOM_Supplier=LCSC, BOM_Supplier Part=C83056, nameAlias=Capacitance, spicePre=C, spiceSymbolName=0402B104K160
DS1: BOM_Manufacturer="Everlight Elec", BOM_Manufacturer Part=16-213SURC/S530-A3/TR8, BOM_Supplier=LCSC, BOM_Supplier Part=C605452, Contributor=LCSC, spicePre=L, spiceSymbolName=16-213SURC/S530-A3/TR8
E1 E2 E3: library part 100OHM, BOM_Manufacturer=Murata, BOM_Manufacturer Part=BLM21PG221SN1x, BOM_Supplier=LCSC, Contributor=prophetC, spicePre=L, spiceSymbolName="220ohm at 100MHz"
L1 L2: library part INDUCTANCE_1, "Inductance"
L3 L4 L5 L6: BOM_JLCPCB SMD=Yes, BOM_Manufacturer=Sunlord, BOM_Manufacturer Part=GZ1608D121TF, BOM_Supplier=LCSC, BOM_Supplier Part=C12391, nameAlias=Value, SMT Type=Extend, spicePre=L, spiceSymbolName=GZ1608D121TF-C12391
P2: "Header, 10-Pin, Dual row", LatestRevisionDate=17-Jul-2002, LatestRevisionNote="Re-released for DXP Platform.", Publisher="Altium Limited"
P4: "Header, 3-Pin", LatestRevisionDate=17-Jul-2002, LatestRevisionNote="Re-released for DXP Platform.", Publisher="Altium Limited"
R1 R8 R36 R37 R39 R40 R41: library part 1, BOM_Manufacturer=YAGEO, BOM_Manufacturer Part=RC0402FR-0780R6L, BOM_Supplier=LCSC, BOM_Supplier Part=C185392, Contributor=LCSC, nameAlias="Resistance (Ohms)", spicePre=R, spiceSymbolName=RC0402FR-0780R6L
R2 R9 R23 R24 R25 R26 R27 R28 R33: library part 10K, BOM_Manufacturer=YAGEO, BOM_Manufacturer Part=RC0402FR-0780R6L, BOM_Supplier=LCSC, BOM_Supplier Part=C185392, Contributor=LCSC, nameAlias="Resistance (Ohms)", spicePre=R, spiceSymbolName=RC0402FR-0780R6L
R3 R4 R10 R11 R12 R17 R18 R19 R20 R21 R22 R29 R30 R31 R32 R34 R35 R38 R42: BOM_Manufacturer=YAGEO, BOM_Manufacturer Part=RC0402FR-0780R6L, BOM_Supplier=LCSC, BOM_Supplier Part=C185392, Contributor=LCSC, nameAlias="Resistance (Ohms)", spicePre=R, spiceSymbolName=RC0402FR-0780R6L
R5 R6 R7: library part RES, "Resistor"
R13: library part 10R, BOM_Manufacturer=YAGEO, BOM_Manufacturer Part=RC0402FR-0780R6L, BOM_Supplier=LCSC, BOM_Supplier Part=C185392, Contributor=LCSC, nameAlias="Resistance (Ohms)", spicePre=R, spiceSymbolName=RC0402FR-0780R6L
R14: library part 39, BOM_Manufacturer=YAGEO, BOM_Manufacturer Part=RC0402FR-0780R6L, BOM_Supplier=LCSC, BOM_Supplier Part=C185392, Contributor=LCSC, nameAlias="Resistance (Ohms)", spicePre=R, spiceSymbolName=RC0402FR-0780R6L
R15 R16: library part 1K, BOM_Manufacturer=YAGEO, BOM_Manufacturer Part=RC0402FR-0780R6L, BOM_Supplier=LCSC, BOM_Supplier Part=C185392, Contributor=LCSC, nameAlias="Resistance (Ohms)", spicePre=R, spiceSymbolName=RC0402FR-0780R6L
REF_CLK RX1A RX2A TX1A TX2A TX_MON1 TX_MON2: BOM_Manufacturer=dosinconn, BOM_Manufacturer Part=DOSIN-806-0010, BOM_Supplier=LCSC, BOM_Supplier Part=C521221, Contributor=LCSC, spicePre=R, spiceSymbolName=DOSIN-806-0010
U2 U4 U5: BOM_Manufacturer="Analog Devices", BOM_Paste Type=expand, BOM_Supplier=LCSC, Contributor=LCSC, spicePre=U
  U2 U4: BOM_Manufacturer Part=ADP1755ACPZ-R7, BOM_Supplier Part=C403695, spiceSymbolName=ADP1755ACPZ-R7
  U5: BOM_Manufacturer Part=AD7291BCPZ-RL7, BOM_Supplier Part=C207434, spiceSymbolName=AD7291BCPZ-RL7
U6: BOM_Manufacturer=STMicroelectronics, BOM_Manufacturer Part=M24C02-WDW6TP, BOM_Paste Type=expand, BOM_Supplier=LCSC, BOM_Supplier Part=C283436, Contributor=LCSC, spicePre=U, spiceSymbolName=M24C02-WDW6TP
X1: library part 30MHz, BOM_Manufacturer=NDK, BOM_Manufacturer Part=NX3225SA-30M, BOM_Supplier=LCSC, BOM_Supplier Part=C139739, Contributor=LCSC, nameAlias=Frequency, spicePre=X, spiceSymbolName=NX3225SA-30M
T1 T2 T3 T4: Contributor=GaAs, spicePre=T, spiceSymbolName=TCM1-63AX+
U1: Contributor=fumanduo, spicePre=U, spiceSymbolName=AD9363_PLUTO

## Free pads (board coordinates)
  round 155 hole 105: ""(2708.5,3985) ""(2709,2193) ""(5212.61,4353.29) ""(5213,1825)

## Via types
v1: diameter 20, hole 10, Top Layer to Bottom Layer, tented both sides, 410 vias
v2: diameter 15.75, hole 7.87, Top Layer to Bottom Layer, tented both sides, 157 vias
v3: diameter 16, hole 8, Top Layer to Bottom Layer, tented both sides, 154 vias
v4: diameter 28, hole 12, Top Layer to Bottom Layer, 14 vias

## Nets (pads, with @x,y where several pads share a name; then routed paths per layer and width w, separated by ;. In a path a pad name is that pad's centre, name@x,y a point inside that pad or via, vN(x,y) a via of type N, cw(c..) or ccw(c..) an arc to the next point about the centre after c; other vN are vias at no path point)
1P3_SUPPLY_A: 1P3_A.1 C18.1 C19.1 C21.1 C22.1 C23.1 C24.1 C26.1 R1.2 R19.1 U1.B9 U1.B10 U1.E2 U1.F2 U1.J3 U1.K3 | length 2115.2
  Top Layer w10: v2(2999.25,3027.01) v2@2999.25,3027.69 ; C23.1@2999.25,3042.43 ccw(c2996.43,3047.5) C23.1@3002.23,3047.5 ; C21.1@3009.64,3185.75 cw(c3007.17,3180.76) C21.1@3012.74,3180.76
  Top Layer w15.5: 2946.73,3033.75 2946.73,3035.25 ; C18.1@2991.73,3254.5 2999.73,3254.5 3003.98,3250.25 3011.48,3242.79 3011.48,3235.25 v2(3030.75,3215.98) ; v2(3251.22,2932.52) C26.1@3267.71,2932.52 ; v1(4358,2066) R19.1@4358,2128
  Top Layer w17: v2@3280.66,2932.52 C22.1@3328.96,2884.22 ; C22.1@3328.96,2875.01 3352.71,2851.26
  Top Layer w20: v1(2597.74,3306.26) v1(2632.74,3306.26) 2721.49,3306.26 2833.99,3193.76 2943.99,3193.76 2947.74,3197.51 2959.5,3185.75 3009.64,3185.75 v2(3029.26,3185.75) ; v1(2599.23,2905) v1(2634.23,2905) 2721.73,2905 2846.73,3030 2941.48,3030 2946.73,3035.25 2991.01,3035.25 2998.57,3027.69 2999.25,3027.69 2999.25,3035.25 2999.25,3042.43 2999.25,3047.5 v2(2999.25,3058.5) ; v1(2599.23,3410) v1(2634.23,3410) 2744.23,3410 2911.73,3242.5 2955.48,3242.5 2959.23,3246.25 2972.48,3254.5 C18.1@2991.73,3254.5 ; C26.1@3267.71,2932.52 v2@3280.66,2932.52 ; 3352.71,2851.26 3352.71,2665.29 v1(3353,2665) ; v1(3353,2575) v1(3353,2608) v1(3353,2638) v1@3353,2664.71
  Bottom Layer w10: v2(2999.25,3027.01) U1.E2@3015,3042.76 ; v2(2999.25,3058.5) U1.F2@3015,3074.25 ; v2(3029.26,3185.75) U1.J3@3045,3170 ; v2(3030.75,3215.98) U1.K3@3046.49,3200.24 ; U1.B9@3235.47,2948.27 v2(3251.22,2932.52) ; U1.B10@3266.97,2948.27 v2(3282.72,2932.52)
  other v3: 4259,3909 4208,3910 4207,3944 4260,3947 4208,3976 4259,3981 4209,4015 4259,4018 4209,4053 4258,4053
1P3_SUPPLY_B: 1P3_B.1 C37.1 C38.1 C41.1 C42.1 C44.1 C45.1 C47.1 C71.2 C72.2 C75.2 C76.2 L3.1 L4.1 L5.1 L6.1 R8.2 R17.1 U1.A9 U1.A10 U1.D2 U1.D3 U1.E3 U1.F12 U1.K4 U1.M9 U1.M10 | length 3560.2
  Top Layer w10: v2(3260,2890) 3261,2891 3290,2891 v2(3291,2892)
  Top Layer w12: v2(3251.22,3278.98) 3258.2,3272 3275.74,3272 v2(3282.72,3278.98) ; C44.1@3287.01,2868.48 3287.01,2850.98 3296.26,2841.73 C47.1@3296.26,2834 ; C44.1@3287.01,2875.98 3291,2879.97 v2(3291,2892)
  Top Layer w15: v2(3030.75,2995.51) v2(3030.75,3027.01)
  Top Layer w15.5: v3@3104.15,2767.85 3118.05,2781.75 3154.75,2781.75 3167.25,2794.25 C75.2@3190,2794.25 ; v3(3153.32,3413.5) 3241.23,3413.5 3252.23,3402.5 3252.23,3380.26 3252.23,3360 3231.98,3339.75 3231.98,3310 3221.73,3299.75 3221.73,3281.25 3236.73,3281.25 ; 3239,3278.98 v2(3251.22,3278.98) ; v3@3278.41,2777.5 3296.26,2795.35 C47.1@3296.26,2834 ; v1(4557,2066) R17.1@4557,2128
  Top Layer w17: C41.1@2952.23,2989.75 C42.1@2987.48,2989.75
  Top Layer w18: C45.1@3035.48,3306.25 3037.75,3306.25 3040.5,3303.5 3040.5,3301.23 3051.5,3290.23 3051.5,3256.25 3062,3245.75 3062,3216.22 v2(3062.24,3215.98)
  Top Layer w20: v1(2599.23,2790) v1(2634.23,2790) 2721.73,2790 2912.98,2981.25 2941.73,2981.25 2942.73,2980.25 C41.1@2952.23,2989.75 ; v1(2599.23,3835) v1(2639.23,3835) 2719.23,3835 2961.73,3592.5 2961.73,3380 C45.1@3035.48,3306.25 ; C42.1@2987.48,2989.75 2993.49,2989.75 v2(2999.25,2995.52) v2(3030.75,2995.51) ; C75.2@3190.01,2796.25 3259.66,2796.25 3271.38,2784.53 3271.38,2777.83 v3(3275.06,2774.15) ; C71.2@3252.23,3380.26 3283.98,3380.26 v3(3324.52,3420.8) 3341.73,3438.01 3341.73,3598 v1(3341.73,3856) ; 3278.41,2766.6 3315.01,2730 v1(3315,2543) 3315,2506 v1(3314,2505)
  Layer 1 w6: v2(3291,2892) 3291,2919.76 3299,2927.76 3299,3043.29 v2(3314.22,3058.51)
  Bottom Layer w10: v2(3030.75,2995.51) U1.D3@3046.49,3011.26 ; v2(3030.75,3027.01) U1.E3@3046.49,3042.76 ; v2(3062.24,3215.98) U1.K4@3077.99,3200.24 ; U1.A9@3235.47,2916.77 v2@3259.5,2892.74 ; U1.M9@3235.47,3263.23 v2(3251.22,3278.98) ; U1.A10@3266.97,2916.77 3291,2892.74 v2(3291,2892) ; U1.M10@3266.97,3263.23 v2(3282.72,3278.98) ; v2(3314.22,3058.51) U1.F12@3329.96,3074.25 ; v2(2999.25,2995.52) U1.D2@3015,3011.26 v2(2999.25,2995.52)
  Bottom Layer w15.5: L5.1@3071,2803 v3(3104.39,2769.61) ; L4.1@3129,3393 3129,3394.19 3148.21,3413.4 3153.22,3413.4 v3(3153.32,3413.5) ; v3(3275.06,2774.15) 3292.16,2791.25 3292.44,2791.25 3311.38,2810.19 L6.1@3311.38,2810.51 ; v3(3324.52,3420.8) 3324.62,3420.7 3325.3,3420.7 3340.44,3405.56 3340.44,3392.75 L3.1@3354.19,3379
  other v1: 3341.87,3734.97 3341.87,3771.97 3341.87,3816.97
  other v3: 4095,4171 4018,4172 4056,4172 4018,4221 4053,4222 4090,4222
1P8V: C1.2 C25.2 C30.2 E2.2 L2.2 R5.1 R6.1 R13.2 U2.1 U2.2 U2.3 U2.15 U2.16 U3.14 U4.1 U4.2 U4.3 U4.15 U4.16 | length 426.1
  Top Layer w8: v3(4422,4345) 4423.53,4343.47 4430.4,4343.47 4436.69,4337.19 4455.56,4337.19 E2.2@4457.75,4335 ; v3(4582,4019) 4582,4016.84 4589.3,4009.54 U3.14@4589.3,3961.1 ; v3(4677,4019) 4731.53,4019 4741.69,4008.85 ; 4741.69,4008.81 4761.5,3989 C1.2@4762.75,3989
  Layer 2 w8: 4338,4218 4385,4265 4385,4308 v3(4422,4345)
  Bottom Layer w8: v3(4422,4345) 4446.73,4320.27 R13.2@4446.73,4290
  other v3: 4381,3797 4369,3845 4383,3864 4339,3874 4416,3884 4380,3886 4355,3891 4321,3893 4343,3914 4320,3916 4342,3936 4320,3945 4342,3962 4322,3981 4350,3988 4386,3989 4608,4018 4631,4019 4654,4020 4563,4026 4576,4043 4561,4058 4561,4082 4562,4106 4251,4171 4276,4172 4228,4193 4253,4195 4276,4195 4202,4219 4226,4219
3.3VAUX: 3P3VAUX.1 C59.2 C63.1 C64.1 P1.D32 R15.2 R16.2 R20.1 U5.10 U5.16 U5.17 U6.8 | length 2369.6
  Top Layer w11: v3(4309.04,2375.77) 4323.15,2389.88 U5.16@4346.79,2389.89 ; v3@4314.1,2370.21 U5.17@4346.79,2370.21 ; U5.10@4493.84,2389.89 4526.21,2389.89 4531.84,2395.52
  Top Layer w15.5: v1(4264,2066) R20.1@4264,2128 ; 4531.84,2395.52 4543.09,2406.77 ; C64.1@4582.09,2418.02 4554.34,2418.02 4543.09,2406.77 ; C64.1@4582.34,2418.27 C63.1@4582.34,2466 ; v3(4652,2366) 4635,2383 4566.86,2383 4543.09,2406.77 ; U6.8@4868.22,4313.92 4868.22,4377.85 ; 4869.61,4378.96 v3(4869.61,4398.96) ; R16.2@4939,4413 v3(4939,4433) ; R15.2@4986.5,4413 v3(4986.5,4433)
  Top Layer w20: v1(5335,3690) P1.D32@5360,3665
  Layer 2 w4: v3(4869.61,4398.96) 4869.61,4259.39 4906.81,4222.19 4964.19,4222.19 4978,4236 5412.31,4236 5513,4135.31 5513,3749.55 5453.45,3690 v1(5335,3690)
  Layer 2 w11: v3(4309.04,2375.77) 4330.31,2354.5 4465.5,2354.5 4475,2345 4579,2345 4600,2366 v3(4652,2366)
3P3V: 3P3V.1 C2.1 C3.1 L1.1 P1.C39 P1.D36 P1.D38 P1.D40 P4.1 R21.1 | length 3828
  Top Layer w15.5: v1(4164,2066) R21.1@4164,2128
  Top Layer w20: v1(5314.18,3865) P1.D36@5360,3865 ; v1(5314.18,3965) P1.D38@5360,3965 ; v1(5314.18,4065) P1.D40@5360,4065 v1(5360,4100) ; v1(5385.85,3991.78) P1.C39@5409.07,4015 ; v1(5386.78,4039.15) P1.C39@5410,4015.93 ; P1.C39@5410,4015 v1(5455.82,4015)
  Layer 1 w20: P4.1@4709,2066 4709,1878 4857,1730 5516,1730 5614,1828 5614,3916 5515,4015 v1(5455.82,4015)
  other v3: 4874,3852 4961.32,3866.28 4933,3867 4874,3879 4932,3886 4961.32,3886.28 4904,3893 4874,3905 4932,3906 4961.32,3906.28 4932.32,3925.28 4961.32,3925.28 4874,3933
12V: P1.C35 P1.C37 P4.3 | length 3279.4
  Top Layer w15.5: v1(4903,1859) 5032,1730 5498,1730 5589,1821 5589,3734 5508,3815 v1(5455.82,3815) 5481.73,3840.91 5481.73,3889.09 v1(5455.82,3915)
  Top Layer w20: P1.C35@5410,3815 v1(5455.82,3815) ; P1.C37@5410,3915 v1(5455.82,3915)
  Layer 1 w15.5: v1(4903,1859) 4903.86,1859.86 4903.86,2060.86 P4.3@4909,2066
AUXADC: C58.1 U1.L5 | length 85.9
  Top Layer w4: v2(3093.75,3247.48) 3108.27,3262 3127.89,3262 3133.89,3268 C58.1@3146,3268
  Layer 2 w4: v2(3093.75,3247.48) v2@3095.75,3245.48
  Bottom Layer w10: v2(3093.75,3247.48) U1.L5@3109.49,3231.73
AUXDAC1: C56.1 U1.B3 | length 39.6
  Top Layer w15.5: C56.1@3024.48,2917.76 3030.74,2924.02 v2(3030.74,2932.53)
  Bottom Layer w10: v2(3030.74,2932.53) U1.B3@3046.49,2948.27
AUXDAC2: C57.1 U1.C3 | length 146.9
  Top Layer w6: 2979.74,2940.52 2988.24,2949.02 3015.74,2949.02 v2(3030.74,2964.02)
  Top Layer w15.5: C57.1@2956.72,2889.5 2963.72,2889.5 2979.22,2905 2979.22,2940
  Bottom Layer w10: v2(3030.74,2964.02) U1.C3@3046.49,2979.76
CLK_OUT: C60.2 P1.H4 U1.J6 | length 3051.8
  Top Layer w15.5: C60.2@4910,1978 4948.93,1978 4957.93,1987 v3(4997,1987) 5013,2003 5013,2206.27 5071.73,2265 P1.H4@5160,2265
  Layer 2 w4: v2(3125.23,3153) 3150,3153 3170.61,3132.39 3170.61,2962.01 3182.48,2950.14 3190.23,2950.14 3203.82,2936.55 3203.82,2928.8 3213.66,2918.96 3213.66,2855.34 3249,2820 3295.54,2820 4005,2110.54 4005,2039 4061,1983 4989.75,1983 4993.75,1987 v3(4997,1987)
  Bottom Layer w10: v2(3125.23,3153) U1.J6@3140.98,3168.74
CTRL_IN0: P1.H28 P2.20 R31.2 U1.C5 | length 3750.3
  Top Layer w4: P2.20@4865,3631 4814,3580 4814,3457 4835,3436 5131,3436 P1.H28@5160,3465
  Top Layer w15.5: P2.20@4864.5,3631.5 R31.2@4864.5,3696
  Layer 2 w4: v2(3093.74,2964.02) 3080,2950.28 3080,2938.6 3079.87,2938.46 3079.87,2925.13 3062.43,2907.7 3062.43,2890.43 3047,2875 2927.69,2875 2826,2976.69 2826,3159.31 2871,3204.31 2871,3289.63 2969,3387.63 2969,3475.2 3136,3642.2 3136,3642.31 3197.69,3704 3736.31,3704 3839.31,3807 4242,3807 4361,3688 4492,3688 4524,3656 4524,3604 4540,3588 4586.63,3588 4822,3588 P2.20@4865,3631
  Bottom Layer w10: v2(3093.74,2964.02) U1.C5@3109.49,2979.76
CTRL_IN1: P1.H29 P2.19 R30.2 U1.C6 | length 5542.6
  Top Layer w4: P2.19@4865,3531 4881,3515 P1.H29@5160,3515
  Top Layer w15.5: R30.2@4864.5,3461 4864.5,3485.24 ; 4865,3485.74 P2.19@4865,3531
  Layer 2 w4: v2(3125.23,2964.02) 3125.23,2931.87 3178,2879.1 3178,2833 3253,2758 3312.28,2758 3972,2098.28 3972,2025 4072,1925 5338,1925 5587,2174 5587,3472 5524.5,3534.5 5451.5,3534.5 5442,3525 5362,3525 5341,3546 5170,3546 5154.5,3530.5 5154,3531 P2.19@4865,3531
  Bottom Layer w10: v2(3125.23,2964.02) U1.C6@3140.98,2979.76
CTRL_IN2: P1.G27 P2.18 R32.2 U1.D6 | length 5531.7
  Top Layer w4: P2.18@4765,3631 4765,3674 ; R32.2@4766,3696 4781,3711 4873,3711 5043,3541 5162,3541 5184,3519 5184,3441 P1.G27@5210,3415
  Top Layer w15.5: P2.18@4765.5,3631.5 R32.2@4765.5,3696 ; P1.G27@5210,3415 v1(5255.82,3415)
  Layer 2 w4: v2(3125.23,2995.52) 3127.48,2993.27 3127.48,2982.09 3139.45,2970.12 3139.45,2928.96 3186,2882.41 3186,2838 3230,2794 3287.59,2794 3980,2101.59 3980,2030.06 4077.06,1933 5334.69,1933 5569,2167.31 5569,3447 5526,3490 5303,3490 5279,3466 5279,3438.18 v1(5255.82,3415)
  Bottom Layer w10: v2(3125.23,2995.52) U1.D6@3140.98,3011.26
CTRL_IN3: P1.G28 P2.17 R29.2 U1.D5 | length 3574.8
  Top Layer w15.5: 4765,3485.74 P2.17@4765,3531 ; R29.2@4765.5,3461 4765.5,3485.24 ; P1.G28@5210,3465 v1(5255.82,3465)
  Layer 2 w4: v2(3093.74,2995.52) 3079,2980.78 3079,2961.16 3064.24,2946.4 3056.49,2946.4 3044.61,2934.52 3044.61,2926.78 3021.83,2904 2937.69,2904 2855,2986.69 2855,3161 2887,3193 2887,3281 2985,3379 2985,3468.57 3204.43,3688 3742.94,3688 3845.94,3791 4195,3791 4312,3674 4487.76,3674 4508,3653.76 4508,3598 4527,3579 4717,3579 P2.17@4765,3531 4834,3462 5252.82,3462 v1(5255.82,3465)
  Bottom Layer w10: v2(3093.74,2995.52) U1.D5@3109.49,3011.26
CTRL_OUT0: P1.G21 P2.11 U1.D4 | length 3495.5
  Top Layer w4: v3(4207,3702) 4209,3702 4236,3675 4390,3675 4413,3652 4413,3583 P2.11@4465,3531 4465,3438 4658,3245 5156.16,3245 5183,3218.16 5183,3199 5195,3187 5227,3187 5243,3171 5243,3148 P1.G21@5210,3115
  Layer 2 w4: v2(3062.24,2995.52) 3060.23,2993.51 3048.37,2993.51 3035.31,2980.45 2924.55,2980.45 2905,3000 2905,3276.37 3001.13,3372.5 3001.13,3462.07 3024,3484.94 3211.06,3672 3749.57,3672 3852.57,3775 4138,3775 4203.1,3709.9 4203.1,3709.15 4207,3705.25 v3(4207,3702)
  Bottom Layer w10: v2(3062.24,2995.52) U1.D4@3077.99,3011.26
CTRL_OUT1: P1.G22 P2.10 U1.E4 | length 2947.2
  Top Layer w4: v2(3062.25,3027.02) 3077.23,3042 3128.34,3042 3141,3054.66 3141,3079.95 3173,3111.95 3173,3125.89 3183.68,3136.57 3191.43,3136.57 3202.1,3147.24 3202.1,3162.1 3207,3167 3256.83,3167 3266.9,3156.93 3266.9,3149.18 3279.08,3137 3288.34,3137 3300.34,3125 3300.34,3110.17 3308.5,3102.01 3324.51,3102.01 3330.03,3102 3340.15,3091.88 3449,3091.88 3542.12,3185 3718,3185 3843,3310 4328,3310 4388,3250 v3(4389,3250) ; P2.10@4365,3631 4312,3578 4312,3461 4581,3192 5159.16,3192 5186.16,3165 P1.G22@5210,3165
  Layer 2 w4: v3(4389,3250) 4389.5,3250.5 4524.5,3250.5 v3(4525,3251)
  Bottom Layer w10: v2(3062.25,3027.02) U1.E4@3077.99,3042.76
CTRL_OUT2: P1.H25 P2.9 U1.E5 | length 3150.4
  Top Layer w15.5: v1(5114.18,3315) P1.H25@5160,3315
  Layer 2 w4: v2(3093.74,3027.02) 3076.72,3010 2992,3010 2915,3087 2915,3275.06 3032,3392.06 3032,3481.63 3214.37,3664 3752.88,3664 3855.88,3767 4095,3767 4217,3645 4217,3605 4245,3577 4307.69,3577 4353.69,3531 P2.9@4365,3531 4365,3514.49 4379.22,3500.27 4379.22,3498.78 4539,3339 5087.55,3339 5111.55,3315 v1(5114.18,3315)
  Bottom Layer w10: v2(3093.74,3027.02) U1.E5@3109.49,3042.76
CTRL_OUT3: P1.H26 P2.8 U1.E6 | length 3362.5
  Top Layer w15.5: v1(5114.18,3365) P1.H26@5160,3365
  Layer 2 w4: v2(3125.23,3027.02) 3107.6,3009.39 3087.99,3009.39 3076.11,2997.51 3076.11,2989.77 3066.34,2980 3058.6,2980 3047,2968.4 3047,2958 3035.4,2946.4 2938.6,2946.4 2895,2990 2895,3277.69 2993.13,3375.81 2993.13,3465.38 2995.47,3467.72 3207.75,3680 3746.25,3680 3849.25,3783 4163,3783 4231,3715 4231,3665 P2.8@4265,3631 4310,3586 4375,3586 4413.5,3547.5 4413.5,3494.5 4543,3365 v1(5114.18,3365)
  Bottom Layer w10: v2(3125.23,3027.02) U1.E6@3140.98,3042.76
CTRL_OUT4: P1.G24 P2.7 U1.F6 | length 3775
  Top Layer w4: v2@3063.5,3091.5 3082.49,3072.51 3111.23,3072.51 v2(3125.23,3058.51) ; v3(4046.4,3693.4) 4173.6,3693.4 4223,3644 4223,3588 P2.7@4271.5,3539.5 ; P2.7@4265,3531 4265,3418 v3(4531,3152)
  Top Layer w15.5: v1(5185,3290) P1.G24@5210,3265
  Layer 2 w4: v2(3062,3090) 3059.76,3092.24 3048.13,3092.24 3036.49,3103.88 3025.12,3103.88 3016.87,3112.13 3016.87,3128.13 2941,3204 2941,3267 3056,3382 3056,3471.69 3224.31,3640 3762.82,3640 3865.82,3743 3996.8,3743 v3(4046.4,3693.4) ; v3(4531,3152) 4534,3149 5375,3149 5416,3190 5416,3257 5383,3290 v1(5185,3290)
  Bottom Layer w10: v2(3125.23,3058.51) U1.F6@3140.98,3074.25
CTRL_OUT5: P1.G25 P2.6 U1.F5 | length 3288.6
  Top Layer w20: P1.G25@5210,3315 v1(5255.82,3315)
  Layer 2 w4: v2(3093.74,3058.51) 3077.23,3042 2996.13,3042 2985.38,3052.75 2985.38,3063.62 2925,3124 2925,3273.75 3040,3388.75 3040,3478.31 3217.69,3656 3756.2,3656 3859.2,3759 4071,3759 4131,3699 4131,3680 4165,3646 P2.6@4165,3631 4213,3583 4213,3503 4401,3315 5071,3315 5095,3291 5143,3291 5167,3315 v1(5255.82,3315)
  Bottom Layer w10: v2(3093.74,3058.51) U1.F5@3109.49,3074.25
CTRL_OUT6: P1.D23 P2.5 U1.F4 | length 3311.6
  Top Layer w15.5: v1(5335,3240) P1.D23@5360,3215
  Layer 2 w4: v2(3062.25,3058.51) 3048.76,3072 3036.88,3072 3032.74,3076.14 3024.99,3076.14 3013.12,3088.01 3013.12,3095.76 3002.88,3106 2970.34,3106 2933,3143.34 2933,3270.43 3048,3385.43 3048,3475 3221,3648 3759.51,3648 3862.51,3751 4048,3751 4113,3686 4113,3659 4123,3649 4123,3573 P2.5@4165,3531 4165,3477 4353,3289 5055,3289 5105,3239 5334,3239 v1(5335,3240)
  Bottom Layer w10: v2(3062.25,3058.51) U1.F4@3077.99,3074.25
CTRL_OUT7: P1.D24 P2.4 U1.G4 | length 3244
  Top Layer w15.5: P1.D24@5360,3265 v1(5385,3240)
  Layer 2 w4: v2(3062.25,3121.5) 3050.75,3133 3041.88,3133 3037.88,3137 3024,3137 2953.88,3207.12 2953.88,3268.56 3064,3378.69 3064,3468.37 3227.63,3632 3766.14,3632 3830.14,3696 4003,3696 4065,3634 P2.4@4065,3631 4103.5,3592.5 4103.5,3444.5 4360,3188 5333,3188 v1(5385,3240)
  Bottom Layer w10: v2(3062.25,3121.5) U1.G4@3077.99,3105.75
DATA_CLK_N: P1.G7 U1.H11 | length 2977.1
  Top Layer w4.96: v2(5190.64,2396.46) P1.G7@5209.18,2415
  Layer 2 w4.02: v2(3314.21,3121.49) 3316.35,3121.49 3345.98,3151.12 3358.88,3151.12 3366.48,3143.52 3393,3143.52 3407.5,3129.02 3488.74,3129.02 3504.38,3113.38 3505.8,3111.96 3510.05,3111.96 3512.87,3114.78 3517.12,3114.78 3521.37,3110.53 3521.37,3106.28 3517.84,3102.75 3517.84,3098.5 3522.09,3094.25 3526.34,3094.25 3528.9,3096.81 3533.15,3096.81 3537.4,3092.56 3537.4,3088.31 3534.84,3085.75 3534.84,3081.5 3539.09,3077.25 3543.34,3077.25 3544.05,3077.96 3548.3,3077.96 3552.55,3073.71 3552.55,3069.46 3552.55,3065.21 3568.96,3048.8 3570.38,3047.38 4241.1,2376.65 4244.39,2373.36 4247.79,2373.36 4260.2,2385.77 4271.07,2385.77 4284.28,2372.56 4284.28,2361.69 4259.18,2336.59 4259.18,2333.19 4267.11,2325.26 4270.51,2325.26 4295.61,2350.36 4306.48,2350.36 4319.69,2337.15 4319.69,2326.28 4294.59,2301.18 4294.59,2297.78 4302.52,2289.85 4305.92,2289.85 4311.48,2295.41 4322.35,2295.41 4330.74,2287.02 4353.02,2287.02 4458.02,2287.02 4503.02,2332.02 4663,2332.02 4667.65,2332.02 4676.06,2340.43 4676.06,2351.09 4689.75,2364.78 4708.43,2364.78 4722.12,2351.09 4722.12,2282.56 4730.52,2274.16 4741.73,2274.16 4750.14,2282.56 4750.14,2351.09 4763.83,2364.78 4782.51,2364.78 4796.2,2351.09 4796.2,2282.56 4804.6,2274.16 4815.81,2274.16 4824.22,2282.56 4824.22,2351.09 4837.91,2364.78 4856.59,2364.78 4870.28,2351.09 4870.28,2288.62 4878.68,2280.21 4889.89,2280.21 4898.3,2288.62 4898.3,2318.33 4911.99,2332.02 4943.08,2332.02 4954.42,2332.02 4998.37,2375.97 5188.29,2375.97 5190.64,2378.32 v2(5190.64,2396.46)
  Bottom Layer w4.96: U1.H11@3298.46,3137.24 v2(3314.21,3121.49)
DATA_CLK_P: P1.G6 U1.G11 | length 2977.6
  Top Layer w4.96: v2(5190.64,2346.46) P1.G6@5209.18,2365
  Layer 2 w4.02: v2(3282.71,3121.5) 3284.76,3119.45 3296.61,3119.45 3308.46,3107.61 3322.61,3107.61 3334.63,3119.63 3354.63,3119.63 3369.25,3134.25 3389.51,3134.25 3403.76,3120 3485,3120 4234.72,2370.28 4238.01,2366.99 4240.66,2364.34 4251.53,2364.34 4263.93,2376.75 4267.33,2376.75 4275.26,2368.82 4275.26,2365.42 4250.16,2340.32 4250.16,2329.45 4263.37,2316.24 4274.24,2316.24 4299.34,2341.34 4302.74,2341.34 4310.67,2333.41 4310.67,2330.01 4285.57,2304.91 4285.57,2294.04 4298.79,2280.83 4309.66,2280.83 4315.22,2286.39 4318.61,2286.39 4327,2278 4344,2278 4461.76,2278 4506.76,2323 4663,2323 4671.39,2323 4685.08,2336.69 4685.08,2347.35 4693.48,2355.76 4704.69,2355.76 4713.1,2347.35 4713.1,2278.83 4726.79,2265.14 4745.47,2265.14 4759.16,2278.83 4759.16,2347.35 4767.56,2355.76 4778.77,2355.76 4787.18,2347.35 4787.18,2278.83 4800.87,2265.14 4819.55,2265.14 4833.24,2278.83 4833.24,2347.35 4841.64,2355.76 4852.85,2355.76 4861.26,2347.35 4861.26,2284.88 4874.95,2271.19 4893.63,2271.19 4907.32,2284.88 4907.32,2314.59 4915.72,2323 4943.08,2323 4958.16,2323 5002.11,2366.95 5188.29,2366.95 5190.64,2364.6 v2(5190.64,2346.46)
  Bottom Layer w4.96: v2(3282.71,3121.5) U1.G11@3298.46,3105.75
EN_AGC: P1.H22 P2.3 U1.G5 | length 2984.6
  Top Layer w15.5: v1(5114.18,3165) P1.H22@5160,3165
  Layer 2 w4: v2(3093.74,3090.01) 3078,3105.75 3078,3125.37 3064.25,3139.12 3056.5,3139.12 3044.61,3151.01 3044.61,3158.74 3035.35,3168 3019,3168 2984,3203 2984,3286 3072,3374 3072,3465.06 3230.94,3624 3769.45,3624 3826.45,3681 3994,3681 4013,3662 4013,3614 4059.84,3567.16 4059.84,3536.16 P2.3@4065,3531 4063,3529 4063,3444 4341,3166 5113.18,3166 v1(5114.18,3165)
  Bottom Layer w10: v2(3093.74,3090.01) U1.G5@3109.49,3105.75
ENABLE: P1.G18 P2.1 U1.G6 | length 2918.4
  Top Layer w15.5: P1.G18@5210,2965 v1(5255.82,2965)
  Layer 2 w4: v2(3125.23,3090.01) 3110,3105.24 3110,3219.36 3099.5,3229.86 3091.14,3229.86 3078,3243 3078,3308 3289,3519 3905,3519 3917,3531 P2.1@3965,3531 3968,3528 3968,3390 4398,2960 4989.31,2960 5016.31,2987 5233.82,2987 v1(5255.82,2965)
  Bottom Layer w10: v2(3125.23,3090.01) U1.G6@3140.98,3105.75
FB_CLK_N: P1.G13 U1.G10 | length 3677.6
  Top Layer w4.96: v2(5191.46,2695.64) P1.G13@5210,2714.18
  Layer 2 w4.02: v2(3251.22,3121.5) 3253.27,3119.45 3265.12,3119.45 3284.99,3099.59 3338.76,3099.59 3346.48,3091.87 3365.43,3091.87 3457.42,3091.87 3460.48,3091.87 3461.3,3091.04 3923.17,2629.17 3926.25,2626.09 3941.52,2610.82 3941.52,2592.29 3913.66,2564.43 3913.66,2552.54 3921.59,2544.62 3933.48,2544.62 3962.74,2573.88 3981.27,2573.88 3993.89,2561.25 3993.89,2542.72 3959.63,2508.46 3959.63,2496.57 3967.56,2488.65 3979.45,2488.65 4013.7,2522.91 4032.24,2522.91 4044.86,2510.28 4044.86,2491.75 4010.6,2457.49 4010.6,2445.61 4018.53,2437.68 4030.41,2437.68 4064.67,2471.94 4083.2,2471.94 4095.83,2459.32 4095.83,2440.78 4061.57,2406.53 4061.57,2394.64 4069.49,2386.71 4081.38,2386.71 4115.64,2420.97 4134.17,2420.97 4146.79,2408.35 4146.79,2389.82 4112.54,2355.56 4112.54,2343.67 4120.46,2335.74 4132.35,2335.74 4165.21,2368.6 4183.74,2368.6 4186.09,2366.25 4189.17,2363.17 4300.32,2252.02 4507.91,2252.02 4512.27,2252.02 4520.67,2260.43 4520.67,2267.04 4533.78,2280.15 4551.63,2280.15 4564.73,2267.04 4564.73,2229.45 4573.14,2221.04 4584.35,2221.04 4592.75,2229.45 4592.75,2267.04 4605.86,2280.15 4623.71,2280.15 4636.81,2267.04 4636.81,2229.45 4645.22,2221.04 4656.43,2221.04 4664.83,2229.45 4664.83,2238.92 4677.94,2252.02 4715.91,2252.02 4921,2252.02 4925.36,2252.02 4932.57,2259.23 4932.57,2295.51 4944.47,2307.42 4960.72,2307.42 4972.63,2295.51 4972.63,2259.23 4979.83,2252.02 5013.91,2252.02 5018.02,2252.02 5023.5,2257.5 5026.58,2260.58 5026.58,2267.38 4999.13,2294.83 4999.13,2308.27 5008.36,2317.5 5021.8,2317.5 5049.25,2290.05 5056.05,2290.05 5086.87,2320.87 5093.51,2327.51 5193.83,2327.51 5217,2350.68 5217,2670.1 v2(5191.46,2695.64)
  Bottom Layer w4.96: v2(3251.22,3121.5) U1.G10@3266.97,3105.75